# EAGLE board Li_Power_Boost_Converter-Panel-v12 (EAGLE 6.5.0), part 1 of 3
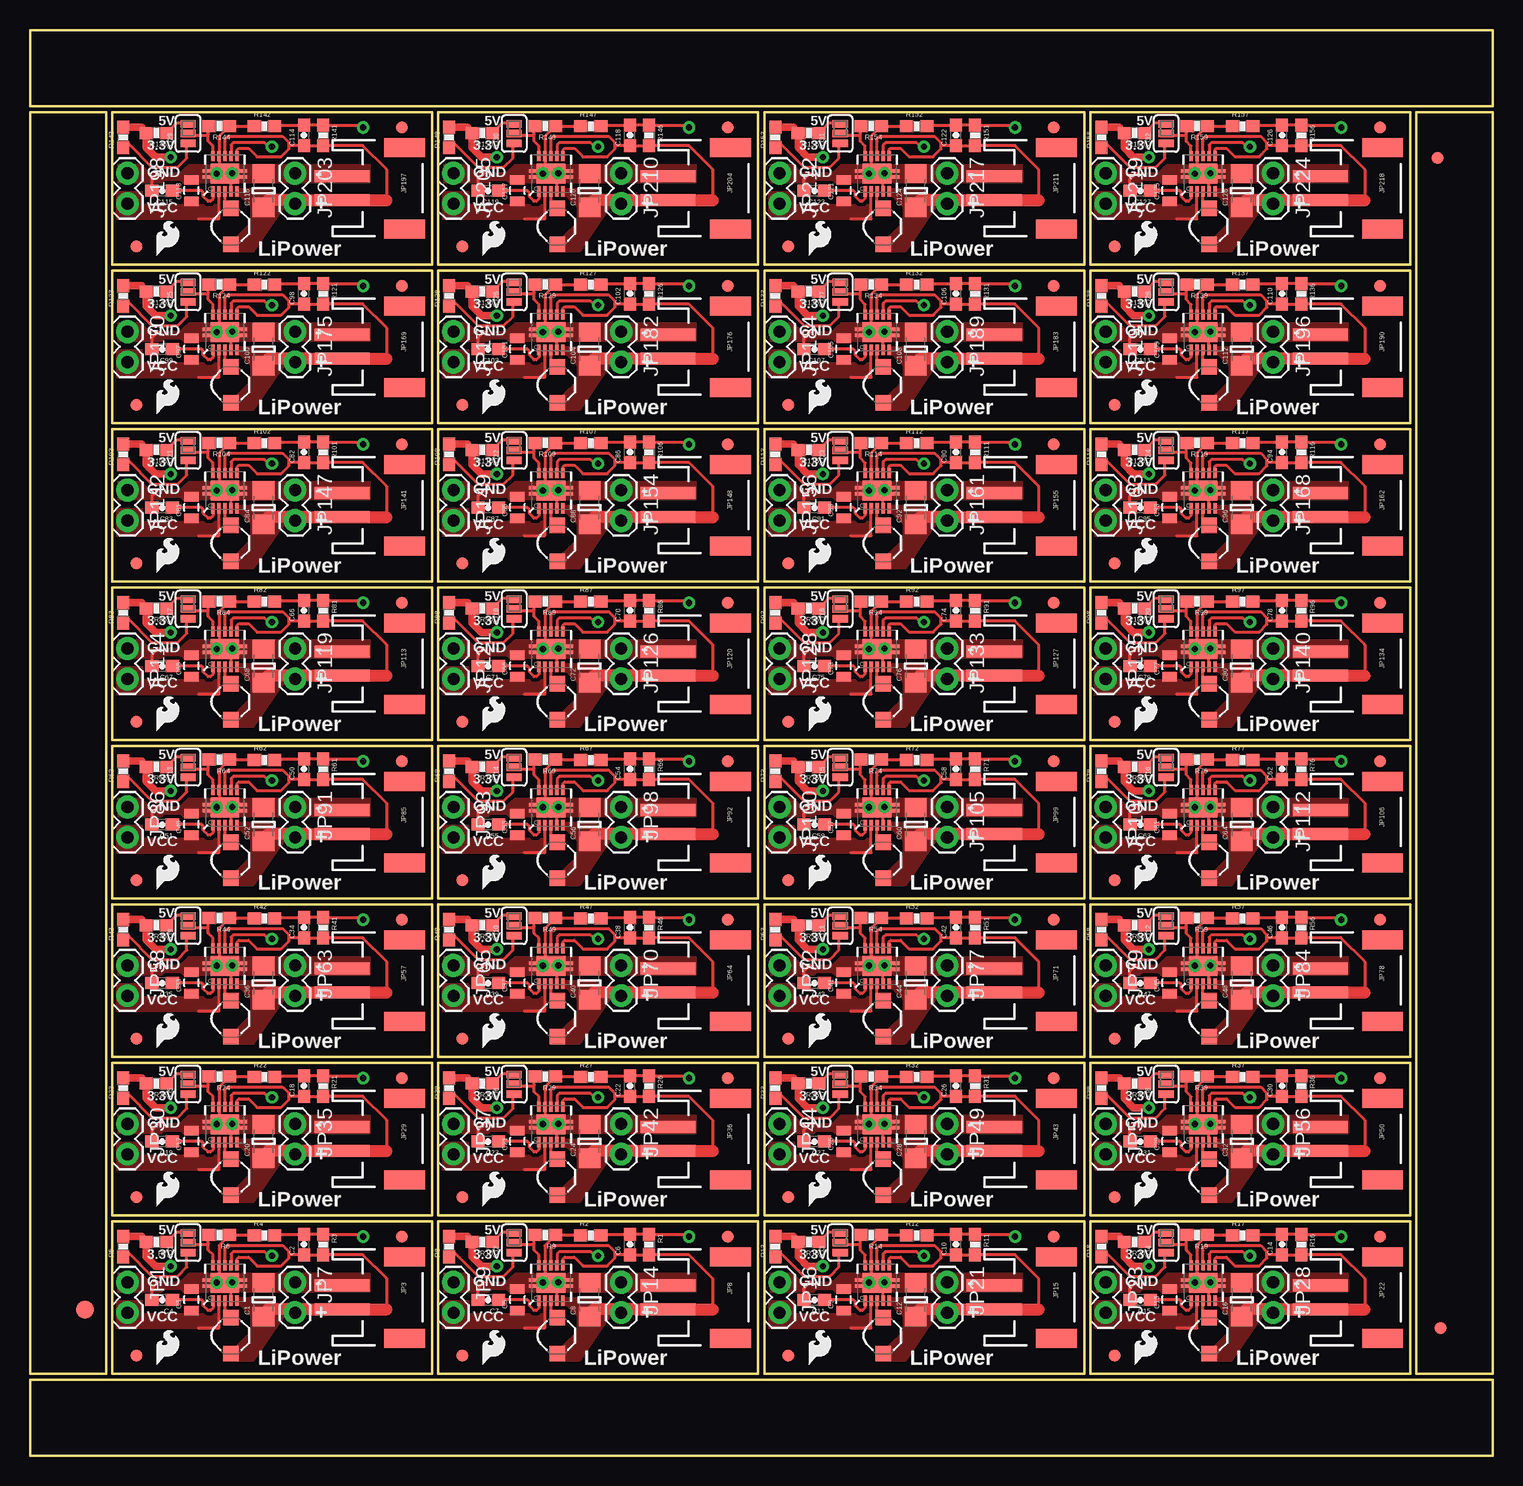
[diagram p0: board, top side]
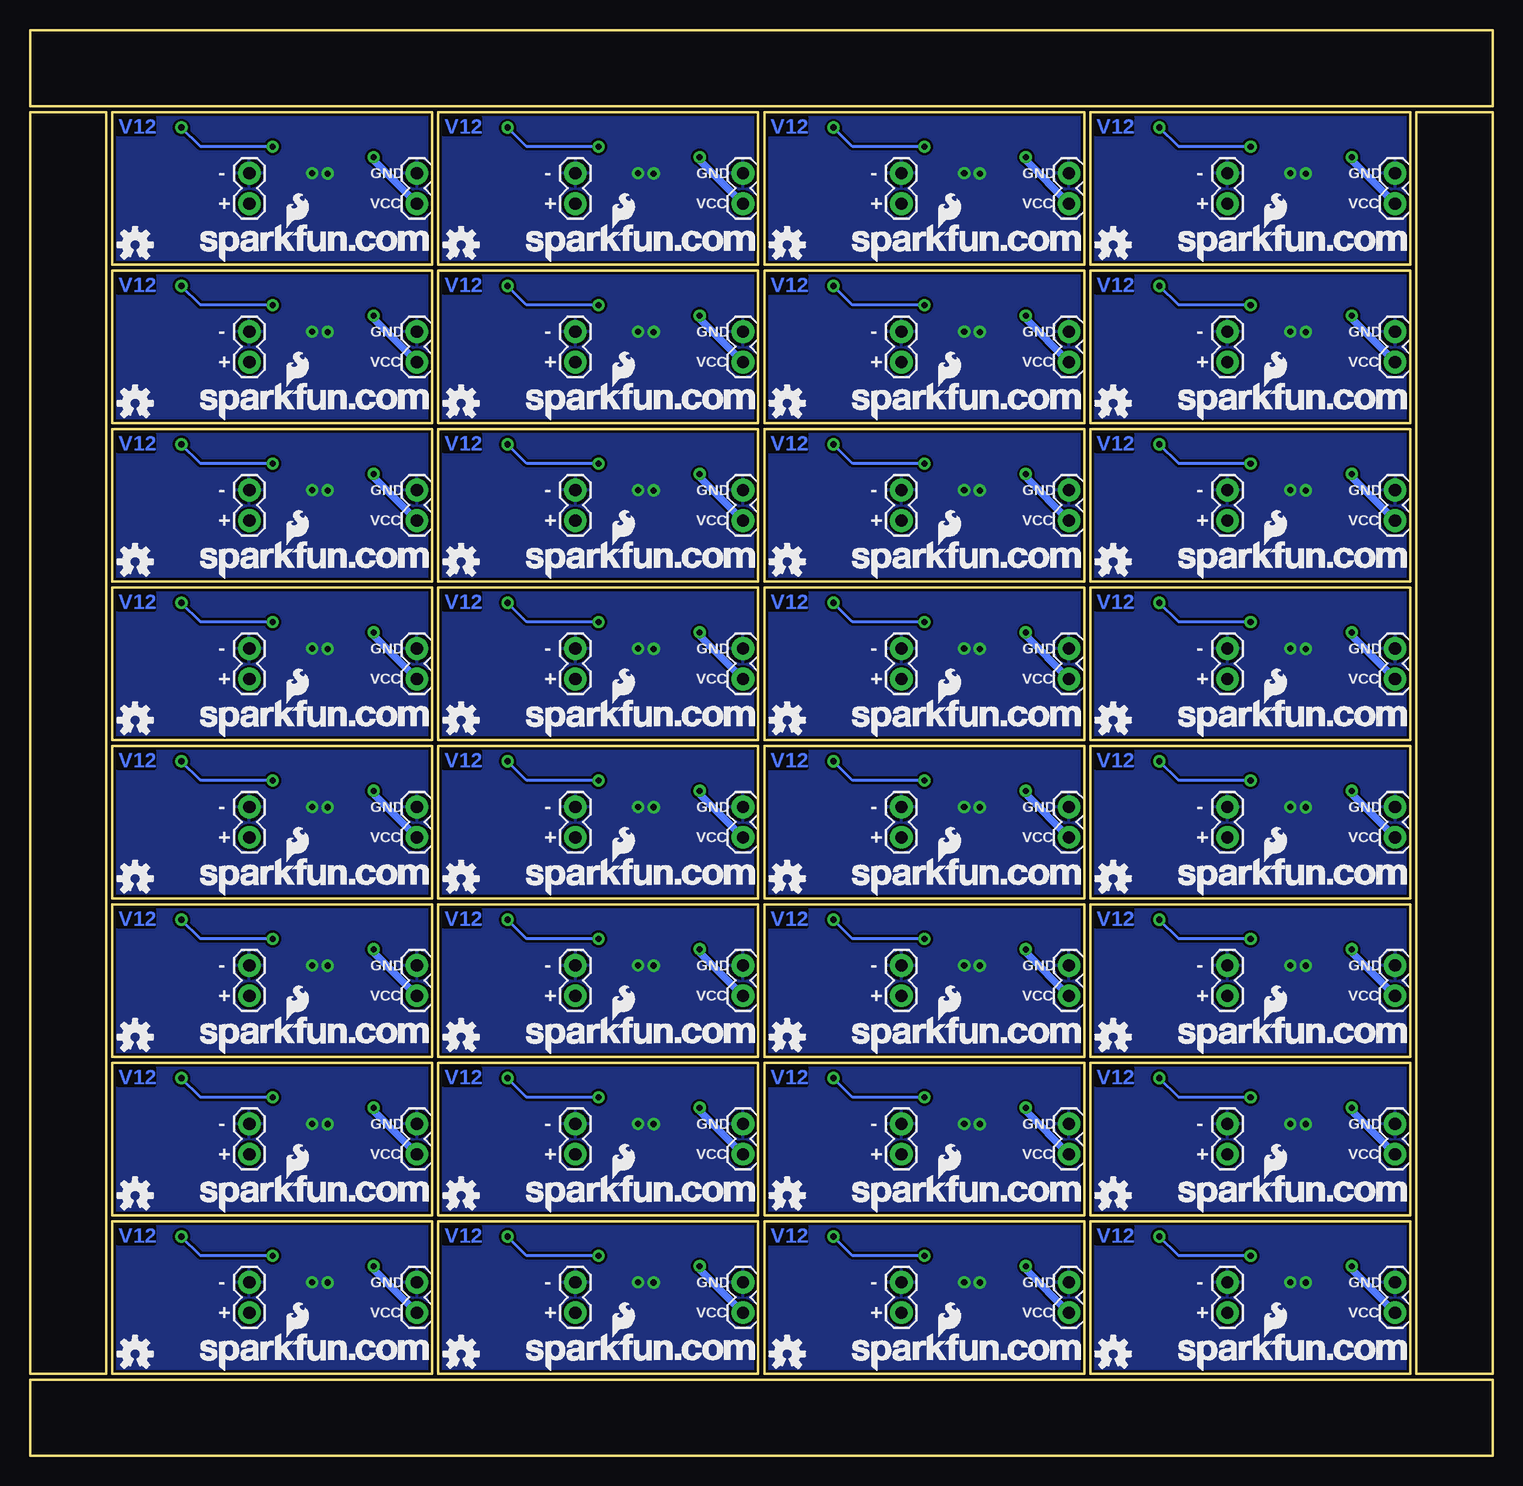
[diagram p1: board, bottom side, seen from below]

Size 121.92 x 118.87 mm. Coordinates in mm from the lower left corner, seen from the top.
Outline: 6.35,95.76 6.35,6.86 0,6.86 0,112.01 6.35,112.01 6.35,89.15
Outline: 29.72,6.35 0,6.35 0,0 121.92,0 121.92,6.35 26.16,6.35
Outline: 115.57,29.72 115.57,6.86 121.92,6.86 121.92,112.01 115.57,112.01 115.57,23.11
Outline: 92.2,112.52 121.92,112.52 121.92,118.87 0,118.87 0,112.52 95.76,112.52
Outline: 6.86,6.86 33.53,6.86 33.53,19.56 6.86,19.56 6.86,6.86
Outline: 34.04,6.86 60.71,6.86 60.71,19.56 34.04,19.56 34.04,6.86
Outline: 61.21,6.86 87.88,6.86 87.88,19.56 61.21,19.56 61.21,6.86
Outline: 88.39,6.86 115.06,6.86 115.06,19.56 88.39,19.56 88.39,6.86
Outline: 6.86,20.07 33.53,20.07 33.53,32.77 6.86,32.77 6.86,20.07
Outline: 34.04,20.07 60.71,20.07 60.71,32.77 34.04,32.77 34.04,20.07
Outline: 61.21,20.07 87.88,20.07 87.88,32.77 61.21,32.77 61.21,20.07
Outline: 88.39,20.07 115.06,20.07 115.06,32.77 88.39,32.77 88.39,20.07
Outline: 6.86,33.27 33.53,33.27 33.53,45.97 6.86,45.97 6.86,33.27
Outline: 34.04,33.27 60.71,33.27 60.71,45.97 34.04,45.97 34.04,33.27
Outline: 61.21,33.27 87.88,33.27 87.88,45.97 61.21,45.97 61.21,33.27
Outline: 88.39,33.27 115.06,33.27 115.06,45.97 88.39,45.97 88.39,33.27
Outline: 6.86,46.48 33.53,46.48 33.53,59.18 6.86,59.18 6.86,46.48
Outline: 34.04,46.48 60.71,46.48 60.71,59.18 34.04,59.18 34.04,46.48
Outline: 61.21,46.48 87.88,46.48 87.88,59.18 61.21,59.18 61.21,46.48
Outline: 88.39,46.48 115.06,46.48 115.06,59.18 88.39,59.18 88.39,46.48
Outline: 6.86,59.69 33.53,59.69 33.53,72.39 6.86,72.39 6.86,59.69
Outline: 34.04,59.69 60.71,59.69 60.71,72.39 34.04,72.39 34.04,59.69
Outline: 61.21,59.69 87.88,59.69 87.88,72.39 61.21,72.39 61.21,59.69
Outline: 88.39,59.69 115.06,59.69 115.06,72.39 88.39,72.39 88.39,59.69
Outline: 6.86,72.9 33.53,72.9 33.53,85.6 6.86,85.6 6.86,72.9
Outline: 34.04,72.9 60.71,72.9 60.71,85.6 34.04,85.6 34.04,72.9
Outline: 61.21,72.9 87.88,72.9 87.88,85.6 61.21,85.6 61.21,72.9
Outline: 88.39,72.9 115.06,72.9 115.06,85.6 88.39,85.6 88.39,72.9
Outline: 6.86,86.11 33.53,86.11 33.53,98.81 6.86,98.81 6.86,86.11
Outline: 34.04,86.11 60.71,86.11 60.71,98.81 34.04,98.81 34.04,86.11
Outline: 61.21,86.11 87.88,86.11 87.88,98.81 61.21,98.81 61.21,86.11
Outline: 88.39,86.11 115.06,86.11 115.06,98.81 88.39,98.81 88.39,86.11
Outline: 6.86,99.31 33.53,99.31 33.53,112.01 6.86,112.01 6.86,99.31
Outline: 34.04,99.31 60.71,99.31 60.71,112.01 34.04,112.01 34.04,99.31
Outline: 61.21,99.31 87.88,99.31 87.88,112.01 61.21,112.01 61.21,99.31
Outline: 88.39,99.31 115.06,99.31 115.06,112.01 88.39,112.01 88.39,99.31
Copper layers (1*16): Top 0.035mm / dielectric 1.5mm / Bottom 0.035mm
Design rules "SparkFun *": minimum track width 8mil, minimum drill 20mil, track to track 8mil, track to pad 8mil, pad to pad 8mil, via to via 8mil, smd to smd 8mil, copper to edge 8mil, drill to drill 8mil, minimum pad ring 12mil, minimum via ring 10mil, stop-mask expansion 4mil, vias tented up to drill 20mil, thermal gap 10mil

## Footprints (pad centres in the part's own frame; a part is rotated, then mirrored left to right if it is on the bottom)
1206 = smd 1.6 x 1.8: 1 -1.4,0; 2 1.4,0
0603-CAP = smd 1.1 x 1: 1 -0.85,0; 2 0.85,0
0805 = smd 0.8 x 1.2: 1 -0.9,0; 2 0.9,0
FIDUCIAL-1.5X3 = smd 1.5 x 1.5: 1 0,0
FIDUCIAL-1X2 = smd 1 x 1: 1 0,0
1X02 = drill 1.016 pad 1.88: 1 0,0; 2 2.54,0
JST-2-SMD = smd 1 x 4.6: 1 -1,-3.7; 2 1,-3.7 | smd 1.6 x 3.4: NC1 -3.4,1.5; NC2 3.4,1.5
CDRH2D09 = smd 1.3 x 1.3: P$1 -1.5,0; P$2 1.5,0
0603-RES = smd 1.1 x 1: 1 -0.85,0; 2 0.85,0
SJ_3_PASTE2&3 = smd 0.635 x 1.27: 1 -0.813,0; 2 0,0; 3 0.813,0
QFN-10_PAD = smd 0.297 x 0.85: 1 -1,-1.475; 2 -0.5,-1.475; 3 0,-1.475; 4 0.5,-1.475; 5 1,-1.475; 6 1,1.475; 7 0.5,1.475; 8 0,1.475; 9 -0.5,1.475; 10 -1,1.475 | smd 0.7 x 0.28: 11 -1.5,0.25; 12 -1.5,-0.25; 13 1.5,0.25; 14 1.5,-0.25 | smd 2.4 x 1.65: 15 0,0

## Placement (x,y rotation side)
C1  10uF  [1206]  19.48,13.03 90 top
C2  0.1uF  [0603-CAP]  22.83,17.63 90 top
C3  22uF  [0805]  13.46,13.03 90 top
C4  0.1uF  [0603-CAP]  11.02,13 180 top
C5  22uF  [0805]  40.64,13.03 90 top
C6  0.1uF  [0603-CAP]  50.01,17.63 90 top
C7  0.1uF  [0603-CAP]  38.2,13 180 top
C8  10uF  [1206]  46.66,13.03 90 top
C9  22uF  [0805]  67.82,13.03 90 top
C10  0.1uF  [0603-CAP]  77.19,17.63 90 top
C11  0.1uF  [0603-CAP]  65.38,13 180 top
C12  10uF  [1206]  73.84,13.03 90 top
C13  22uF  [0805]  95,13.03 90 top
C14  0.1uF  [0603-CAP]  104.37,17.63 90 top
C15  0.1uF  [0603-CAP]  92.56,13 180 top
C16  10uF  [1206]  101.02,13.03 90 top
C17  22uF  [0805]  13.46,26.24 90 top
C18  0.1uF  [0603-CAP]  22.83,30.84 90 top
C19  0.1uF  [0603-CAP]  11.02,26.21 180 top
C20  10uF  [1206]  19.48,26.24 90 top
C21  22uF  [0805]  40.64,26.24 90 top
C22  0.1uF  [0603-CAP]  50.01,30.84 90 top
C23  0.1uF  [0603-CAP]  38.2,26.21 180 top
C24  10uF  [1206]  46.66,26.24 90 top
C25  22uF  [0805]  67.82,26.24 90 top
C26  0.1uF  [0603-CAP]  77.19,30.84 90 top
C27  0.1uF  [0603-CAP]  65.38,26.21 180 top
C28  10uF  [1206]  73.84,26.24 90 top
C29  22uF  [0805]  95,26.24 90 top
C30  0.1uF  [0603-CAP]  104.37,30.84 90 top
C31  0.1uF  [0603-CAP]  92.56,26.21 180 top
C32  10uF  [1206]  101.02,26.24 90 top
C33  22uF  [0805]  13.46,39.45 90 top
C34  0.1uF  [0603-CAP]  22.83,44.04 90 top
C35  0.1uF  [0603-CAP]  11.02,39.42 180 top
C36  10uF  [1206]  19.48,39.45 90 top
C37  22uF  [0805]  40.64,39.45 90 top
C38  0.1uF  [0603-CAP]  50.01,44.04 90 top
C39  0.1uF  [0603-CAP]  38.2,39.42 180 top
C40  10uF  [1206]  46.66,39.45 90 top
C41  22uF  [0805]  67.82,39.45 90 top
C42  0.1uF  [0603-CAP]  77.19,44.04 90 top
C43  0.1uF  [0603-CAP]  65.38,39.42 180 top
C44  10uF  [1206]  73.84,39.45 90 top
C45  22uF  [0805]  95,39.45 90 top
C46  0.1uF  [0603-CAP]  104.37,44.04 90 top
C47  0.1uF  [0603-CAP]  92.56,39.42 180 top
C48  10uF  [1206]  101.02,39.45 90 top
C49  22uF  [0805]  13.46,52.65 90 top
C50  0.1uF  [0603-CAP]  22.83,57.25 90 top
C51  0.1uF  [0603-CAP]  11.02,52.63 180 top
C52  10uF  [1206]  19.48,52.65 90 top
C53  22uF  [0805]  40.64,52.65 90 top
C54  0.1uF  [0603-CAP]  50.01,57.25 90 top
C55  0.1uF  [0603-CAP]  38.2,52.63 180 top
C56  10uF  [1206]  46.66,52.65 90 top
C57  22uF  [0805]  67.82,52.65 90 top
C58  0.1uF  [0603-CAP]  77.19,57.25 90 top
C59  0.1uF  [0603-CAP]  65.38,52.63 180 top
C60  10uF  [1206]  73.84,52.65 90 top
C61  22uF  [0805]  95,52.65 90 top
C62  0.1uF  [0603-CAP]  104.37,57.25 90 top
C63  0.1uF  [0603-CAP]  92.56,52.63 180 top
C64  10uF  [1206]  101.02,52.65 90 top
C65  22uF  [0805]  13.46,65.86 90 top
C66  0.1uF  [0603-CAP]  22.83,70.46 90 top
C67  0.1uF  [0603-CAP]  11.02,65.84 180 top
C68  10uF  [1206]  19.48,65.86 90 top
C69  22uF  [0805]  40.64,65.86 90 top
C70  0.1uF  [0603-CAP]  50.01,70.46 90 top
C71  0.1uF  [0603-CAP]  38.2,65.84 180 top
C72  10uF  [1206]  46.66,65.86 90 top
C73  22uF  [0805]  67.82,65.86 90 top
C74  0.1uF  [0603-CAP]  77.19,70.46 90 top
C75  0.1uF  [0603-CAP]  65.38,65.84 180 top
C76  10uF  [1206]  73.84,65.86 90 top
C77  22uF  [0805]  95,65.86 90 top
C78  0.1uF  [0603-CAP]  104.37,70.46 90 top
C79  0.1uF  [0603-CAP]  92.56,65.84 180 top
C80  10uF  [1206]  101.02,65.86 90 top
C81  22uF  [0805]  13.46,79.07 90 top
C82  0.1uF  [0603-CAP]  22.83,83.67 90 top
C83  0.1uF  [0603-CAP]  11.02,79.04 180 top
C84  10uF  [1206]  19.48,79.07 90 top
C85  22uF  [0805]  40.64,79.07 90 top
C86  0.1uF  [0603-CAP]  50.01,83.67 90 top
C87  0.1uF  [0603-CAP]  38.2,79.04 180 top
C88  10uF  [1206]  46.66,79.07 90 top
C89  22uF  [0805]  67.82,79.07 90 top
C90  0.1uF  [0603-CAP]  77.19,83.67 90 top
C91  0.1uF  [0603-CAP]  65.38,79.04 180 top
C92  10uF  [1206]  73.84,79.07 90 top
C93  22uF  [0805]  95,79.07 90 top
C94  0.1uF  [0603-CAP]  104.37,83.67 90 top
C95  0.1uF  [0603-CAP]  92.56,79.04 180 top
C96  10uF  [1206]  101.02,79.07 90 top
C97  22uF  [0805]  13.46,92.28 90 top
C98  0.1uF  [0603-CAP]  22.83,96.88 90 top
C99  0.1uF  [0603-CAP]  11.02,92.25 180 top
C100  10uF  [1206]  19.48,92.28 90 top
C101  22uF  [0805]  40.64,92.28 90 top
C102  0.1uF  [0603-CAP]  50.01,96.88 90 top
C103  0.1uF  [0603-CAP]  38.2,92.25 180 top
C104  10uF  [1206]  46.66,92.28 90 top
C105  22uF  [0805]  67.82,92.28 90 top
C106  0.1uF  [0603-CAP]  77.19,96.88 90 top
C107  0.1uF  [0603-CAP]  65.38,92.25 180 top
C108  10uF  [1206]  73.84,92.28 90 top
C109  22uF  [0805]  95,92.28 90 top
C110  0.1uF  [0603-CAP]  104.37,96.88 90 top
C111  0.1uF  [0603-CAP]  92.56,92.25 180 top
C112  10uF  [1206]  101.02,92.28 90 top
C113  22uF  [0805]  13.46,105.49 90 top
C114  0.1uF  [0603-CAP]  22.83,110.08 90 top
C115  0.1uF  [0603-CAP]  11.02,105.46 180 top
C116  10uF  [1206]  19.48,105.49 90 top
C117  22uF  [0805]  40.64,105.49 90 top
C118  0.1uF  [0603-CAP]  50.01,110.08 90 top
C119  0.1uF  [0603-CAP]  38.2,105.46 180 top
C120  10uF  [1206]  46.66,105.49 90 top
C121  22uF  [0805]  67.82,105.49 90 top
C122  0.1uF  [0603-CAP]  77.19,110.08 90 top
C123  0.1uF  [0603-CAP]  65.38,105.46 180 top
C124  10uF  [1206]  73.84,105.49 90 top
C125  22uF  [0805]  95,105.49 90 top
C126  0.1uF  [0603-CAP]  104.37,110.08 90 top
C127  0.1uF  [0603-CAP]  92.56,105.46 180 top
C128  10uF  [1206]  101.02,105.49 90 top
E$1  [FIDUCIAL-1.5X3]  4.57,12.19 0 top
E$4  [FIDUCIAL-1X2]  117.6,10.67 0 top
E$5  [FIDUCIAL-1X2]  117.35,108.2 180 top
JP1  VOUT  [1X02]  8.13,14.48 270 top
JP2  LOGO-SFESK  [SFE-LOGO-FLAME]  10.57,7.65 0 top
JP3  JST  [JST-2-SMD]  29.72,13.21 270 top
JP4  FIDUCIAL1X2  [FIDUCIAL-1X2]  8.86,8.36 0 top
JP5  FIDUCIAL1X2  [FIDUCIAL-1X2]  30.99,18.29 0 top
JP6  LOGO-SFENEW  [SFE-NEW-WEBLOGO]  26.22,7.07 0 bottom
JP7  VIN  [1X02]  22.1,14.48 270 top
JP8  JST  [JST-2-SMD]  56.9,13.21 270 top
JP9  VOUT  [1X02]  35.31,14.48 270 top
JP10  LOGO-SFESK  [SFE-LOGO-FLAME]  37.74,7.65 0 top
JP11  FIDUCIAL1X2  [FIDUCIAL-1X2]  36.04,8.36 0 top
JP12  FIDUCIAL1X2  [FIDUCIAL-1X2]  58.17,18.29 0 top
JP13  LOGO-SFENEW  [SFE-NEW-WEBLOGO]  53.4,7.07 0 bottom
JP14  VIN  [1X02]  49.28,14.48 270 top
JP15  JST  [JST-2-SMD]  84.07,13.21 270 top
JP16  VOUT  [1X02]  62.48,14.48 270 top
JP17  LOGO-SFESK  [SFE-LOGO-FLAME]  64.92,7.65 0 top
JP18  FIDUCIAL1X2  [FIDUCIAL-1X2]  63.22,8.36 0 top
JP19  FIDUCIAL1X2  [FIDUCIAL-1X2]  85.34,18.29 0 top
JP20  LOGO-SFENEW  [SFE-NEW-WEBLOGO]  80.57,7.07 0 bottom
JP21  VIN  [1X02]  76.45,14.48 270 top
JP22  JST  [JST-2-SMD]  111.25,13.21 270 top
JP23  VOUT  [1X02]  89.66,14.48 270 top
JP24  LOGO-SFESK  [SFE-LOGO-FLAME]  92.1,7.65 0 top
JP25  FIDUCIAL1X2  [FIDUCIAL-1X2]  90.4,8.36 0 top
JP26  FIDUCIAL1X2  [FIDUCIAL-1X2]  112.52,18.29 0 top
JP27  LOGO-SFENEW  [SFE-NEW-WEBLOGO]  107.75,7.07 0 bottom
JP28  VIN  [1X02]  103.63,14.48 270 top
JP29  JST  [JST-2-SMD]  29.72,26.42 270 top
JP30  VOUT  [1X02]  8.13,27.69 270 top
JP31  LOGO-SFESK  [SFE-LOGO-FLAME]  10.57,20.85 0 top
JP32  FIDUCIAL1X2  [FIDUCIAL-1X2]  8.86,21.56 0 top
JP33  FIDUCIAL1X2  [FIDUCIAL-1X2]  30.99,31.5 0 top
JP34  LOGO-SFENEW  [SFE-NEW-WEBLOGO]  26.22,20.28 0 bottom
JP35  VIN  [1X02]  22.1,27.69 270 top
JP36  JST  [JST-2-SMD]  56.9,26.42 270 top
JP37  VOUT  [1X02]  35.31,27.69 270 top
JP38  LOGO-SFESK  [SFE-LOGO-FLAME]  37.74,20.85 0 top
JP39  FIDUCIAL1X2  [FIDUCIAL-1X2]  36.04,21.56 0 top
JP40  FIDUCIAL1X2  [FIDUCIAL-1X2]  58.17,31.5 0 top
JP41  LOGO-SFENEW  [SFE-NEW-WEBLOGO]  53.4,20.28 0 bottom
JP42  VIN  [1X02]  49.28,27.69 270 top
JP43  JST  [JST-2-SMD]  84.07,26.42 270 top
JP44  VOUT  [1X02]  62.48,27.69 270 top
JP45  LOGO-SFESK  [SFE-LOGO-FLAME]  64.92,20.85 0 top
JP46  FIDUCIAL1X2  [FIDUCIAL-1X2]  63.22,21.56 0 top
JP47  FIDUCIAL1X2  [FIDUCIAL-1X2]  85.34,31.5 0 top
JP48  LOGO-SFENEW  [SFE-NEW-WEBLOGO]  80.57,20.28 0 bottom
JP49  VIN  [1X02]  76.45,27.69 270 top
JP50  JST  [JST-2-SMD]  111.25,26.42 270 top
JP51  VOUT  [1X02]  89.66,27.69 270 top
JP52  LOGO-SFESK  [SFE-LOGO-FLAME]  92.1,20.85 0 top
JP53  FIDUCIAL1X2  [FIDUCIAL-1X2]  90.4,21.56 0 top
JP54  FIDUCIAL1X2  [FIDUCIAL-1X2]  112.52,31.5 0 top
JP55  LOGO-SFENEW  [SFE-NEW-WEBLOGO]  107.75,20.28 0 bottom
JP56  VIN  [1X02]  103.63,27.69 270 top
JP57  JST  [JST-2-SMD]  29.72,39.62 270 top
JP58  VOUT  [1X02]  8.13,40.89 270 top
JP59  LOGO-SFESK  [SFE-LOGO-FLAME]  10.57,34.06 0 top
JP60  FIDUCIAL1X2  [FIDUCIAL-1X2]  8.86,34.77 0 top
JP61  FIDUCIAL1X2  [FIDUCIAL-1X2]  30.99,44.7 0 top
JP62  LOGO-SFENEW  [SFE-NEW-WEBLOGO]  26.22,33.48 0 bottom
JP63  VIN  [1X02]  22.1,40.89 270 top
JP64  JST  [JST-2-SMD]  56.9,39.62 270 top
JP65  VOUT  [1X02]  35.31,40.89 270 top
JP66  LOGO-SFESK  [SFE-LOGO-FLAME]  37.74,34.06 0 top
JP67  FIDUCIAL1X2  [FIDUCIAL-1X2]  36.04,34.77 0 top
JP68  FIDUCIAL1X2  [FIDUCIAL-1X2]  58.17,44.7 0 top
JP69  LOGO-SFENEW  [SFE-NEW-WEBLOGO]  53.4,33.48 0 bottom
JP70  VIN  [1X02]  49.28,40.89 270 top
JP71  JST  [JST-2-SMD]  84.07,39.62 270 top
JP72  VOUT  [1X02]  62.48,40.89 270 top
JP73  LOGO-SFESK  [SFE-LOGO-FLAME]  64.92,34.06 0 top
JP74  FIDUCIAL1X2  [FIDUCIAL-1X2]  63.22,34.77 0 top
JP75  FIDUCIAL1X2  [FIDUCIAL-1X2]  85.34,44.7 0 top
JP76  LOGO-SFENEW  [SFE-NEW-WEBLOGO]  80.57,33.48 0 bottom
JP77  VIN  [1X02]  76.45,40.89 270 top
JP78  JST  [JST-2-SMD]  111.25,39.62 270 top
JP79  VOUT  [1X02]  89.66,40.89 270 top
JP80  LOGO-SFESK  [SFE-LOGO-FLAME]  92.1,34.06 0 top
JP81  FIDUCIAL1X2  [FIDUCIAL-1X2]  90.4,34.77 0 top
JP82  FIDUCIAL1X2  [FIDUCIAL-1X2]  112.52,44.7 0 top
JP83  LOGO-SFENEW  [SFE-NEW-WEBLOGO]  107.75,33.48 0 bottom
JP84  VIN  [1X02]  103.63,40.89 270 top
JP85  JST  [JST-2-SMD]  29.72,52.83 270 top
JP86  VOUT  [1X02]  8.13,54.1 270 top
JP87  LOGO-SFESK  [SFE-LOGO-FLAME]  10.57,47.27 0 top
JP88  FIDUCIAL1X2  [FIDUCIAL-1X2]  8.86,47.98 0 top
JP89  FIDUCIAL1X2  [FIDUCIAL-1X2]  30.99,57.91 0 top
JP90  LOGO-SFENEW  [SFE-NEW-WEBLOGO]  26.22,46.69 0 bottom
JP91  VIN  [1X02]  22.1,54.1 270 top
JP92  JST  [JST-2-SMD]  56.9,52.83 270 top
JP93  VOUT  [1X02]  35.31,54.1 270 top
JP94  LOGO-SFESK  [SFE-LOGO-FLAME]  37.74,47.27 0 top
JP95  FIDUCIAL1X2  [FIDUCIAL-1X2]  36.04,47.98 0 top
JP96  FIDUCIAL1X2  [FIDUCIAL-1X2]  58.17,57.91 0 top
JP97  LOGO-SFENEW  [SFE-NEW-WEBLOGO]  53.4,46.69 0 bottom
JP98  VIN  [1X02]  49.28,54.1 270 top
JP99  JST  [JST-2-SMD]  84.07,52.83 270 top
JP100  VOUT  [1X02]  62.48,54.1 270 top
JP101  LOGO-SFESK  [SFE-LOGO-FLAME]  64.92,47.27 0 top
JP102  FIDUCIAL1X2  [FIDUCIAL-1X2]  63.22,47.98 0 top
JP103  FIDUCIAL1X2  [FIDUCIAL-1X2]  85.34,57.91 0 top
JP104  LOGO-SFENEW  [SFE-NEW-WEBLOGO]  80.57,46.69 0 bottom
JP105  VIN  [1X02]  76.45,54.1 270 top
JP106  JST  [JST-2-SMD]  111.25,52.83 270 top
JP107  VOUT  [1X02]  89.66,54.1 270 top
JP108  LOGO-SFESK  [SFE-LOGO-FLAME]  92.1,47.27 0 top
JP109  FIDUCIAL1X2  [FIDUCIAL-1X2]  90.4,47.98 0 top
JP110  FIDUCIAL1X2  [FIDUCIAL-1X2]  112.52,57.91 0 top
JP111  LOGO-SFENEW  [SFE-NEW-WEBLOGO]  107.75,46.69 0 bottom
JP112  VIN  [1X02]  103.63,54.1 270 top
JP113  JST  [JST-2-SMD]  29.72,66.04 270 top
JP114  VOUT  [1X02]  8.13,67.31 270 top
JP115  LOGO-SFESK  [SFE-LOGO-FLAME]  10.57,60.48 0 top
JP116  FIDUCIAL1X2  [FIDUCIAL-1X2]  8.86,61.19 0 top
JP117  FIDUCIAL1X2  [FIDUCIAL-1X2]  30.99,71.12 0 top
JP118  LOGO-SFENEW  [SFE-NEW-WEBLOGO]  26.22,59.9 0 bottom
JP119  VIN  [1X02]  22.1,67.31 270 top
JP120  JST  [JST-2-SMD]  56.9,66.04 270 top
JP121  VOUT  [1X02]  35.31,67.31 270 top
JP122  LOGO-SFESK  [SFE-LOGO-FLAME]  37.74,60.48 0 top
JP123  FIDUCIAL1X2  [FIDUCIAL-1X2]  36.04,61.19 0 top
JP124  FIDUCIAL1X2  [FIDUCIAL-1X2]  58.17,71.12 0 top
JP125  LOGO-SFENEW  [SFE-NEW-WEBLOGO]  53.4,59.9 0 bottom
JP126  VIN  [1X02]  49.28,67.31 270 top
JP127  JST  [JST-2-SMD]  84.07,66.04 270 top
JP128  VOUT  [1X02]  62.48,67.31 270 top
JP129  LOGO-SFESK  [SFE-LOGO-FLAME]  64.92,60.48 0 top
JP130  FIDUCIAL1X2  [FIDUCIAL-1X2]  63.22,61.19 0 top
JP131  FIDUCIAL1X2  [FIDUCIAL-1X2]  85.34,71.12 0 top
JP132  LOGO-SFENEW  [SFE-NEW-WEBLOGO]  80.57,59.9 0 bottom
JP133  VIN  [1X02]  76.45,67.31 270 top
JP134  JST  [JST-2-SMD]  111.25,66.04 270 top
JP135  VOUT  [1X02]  89.66,67.31 270 top
JP136  LOGO-SFESK  [SFE-LOGO-FLAME]  92.1,60.48 0 top
JP137  FIDUCIAL1X2  [FIDUCIAL-1X2]  90.4,61.19 0 top
JP138  FIDUCIAL1X2  [FIDUCIAL-1X2]  112.52,71.12 0 top
JP139  LOGO-SFENEW  [SFE-NEW-WEBLOGO]  107.75,59.9 0 bottom
JP140  VIN  [1X02]  103.63,67.31 270 top
JP141  JST  [JST-2-SMD]  29.72,79.25 270 top
JP142  VOUT  [1X02]  8.13,80.52 270 top
JP143  LOGO-SFESK  [SFE-LOGO-FLAME]  10.57,73.69 0 top
JP144  FIDUCIAL1X2  [FIDUCIAL-1X2]  8.86,74.4 0 top
JP145  FIDUCIAL1X2  [FIDUCIAL-1X2]  30.99,84.33 0 top
JP146  LOGO-SFENEW  [SFE-NEW-WEBLOGO]  26.22,73.11 0 bottom
JP147  VIN  [1X02]  22.1,80.52 270 top
JP148  JST  [JST-2-SMD]  56.9,79.25 270 top
JP149  VOUT  [1X02]  35.31,80.52 270 top
JP150  LOGO-SFESK  [SFE-LOGO-FLAME]  37.74,73.69 0 top
JP151  FIDUCIAL1X2  [FIDUCIAL-1X2]  36.04,74.4 0 top
JP152  FIDUCIAL1X2  [FIDUCIAL-1X2]  58.17,84.33 0 top
JP153  LOGO-SFENEW  [SFE-NEW-WEBLOGO]  53.4,73.11 0 bottom
JP154  VIN  [1X02]  49.28,80.52 270 top
JP155  JST  [JST-2-SMD]  84.07,79.25 270 top
JP156  VOUT  [1X02]  62.48,80.52 270 top
JP157  LOGO-SFESK  [SFE-LOGO-FLAME]  64.92,73.69 0 top
JP158  FIDUCIAL1X2  [FIDUCIAL-1X2]  63.22,74.4 0 top
JP159  FIDUCIAL1X2  [FIDUCIAL-1X2]  85.34,84.33 0 top
JP160  LOGO-SFENEW  [SFE-NEW-WEBLOGO]  80.57,73.11 0 bottom
JP161  VIN  [1X02]  76.45,80.52 270 top
JP162  JST  [JST-2-SMD]  111.25,79.25 270 top
JP163  VOUT  [1X02]  89.66,80.52 270 top
JP164  LOGO-SFESK  [SFE-LOGO-FLAME]  92.1,73.69 0 top
JP165  FIDUCIAL1X2  [FIDUCIAL-1X2]  90.4,74.4 0 top
JP166  FIDUCIAL1X2  [FIDUCIAL-1X2]  112.52,84.33 0 top
JP167  LOGO-SFENEW  [SFE-NEW-WEBLOGO]  107.75,73.11 0 bottom
JP168  VIN  [1X02]  103.63,80.52 270 top
JP169  JST  [JST-2-SMD]  29.72,92.46 270 top
JP170  VOUT  [1X02]  8.13,93.73 270 top
JP171  LOGO-SFESK  [SFE-LOGO-FLAME]  10.57,86.89 0 top
JP172  FIDUCIAL1X2  [FIDUCIAL-1X2]  8.86,87.6 0 top
JP173  FIDUCIAL1X2  [FIDUCIAL-1X2]  30.99,97.54 0 top
JP174  LOGO-SFENEW  [SFE-NEW-WEBLOGO]  26.22,86.32 0 bottom
JP175  VIN  [1X02]  22.1,93.73 270 top
JP176  JST  [JST-2-SMD]  56.9,92.46 270 top
JP177  VOUT  [1X02]  35.31,93.73 270 top
JP178  LOGO-SFESK  [SFE-LOGO-FLAME]  37.74,86.89 0 top
JP179  FIDUCIAL1X2  [FIDUCIAL-1X2]  36.04,87.6 0 top
JP180  FIDUCIAL1X2  [FIDUCIAL-1X2]  58.17,97.54 0 top
JP181  LOGO-SFENEW  [SFE-NEW-WEBLOGO]  53.4,86.32 0 bottom
JP182  VIN  [1X02]  49.28,93.73 270 top
JP183  JST  [JST-2-SMD]  84.07,92.46 270 top
JP184  VOUT  [1X02]  62.48,93.73 270 top
JP185  LOGO-SFESK  [SFE-LOGO-FLAME]  64.92,86.89 0 top
JP186  FIDUCIAL1X2  [FIDUCIAL-1X2]  63.22,87.6 0 top
JP187  FIDUCIAL1X2  [FIDUCIAL-1X2]  85.34,97.54 0 top
JP188  LOGO-SFENEW  [SFE-NEW-WEBLOGO]  80.57,86.32 0 bottom
JP189  VIN  [1X02]  76.45,93.73 270 top
JP190  JST  [JST-2-SMD]  111.25,92.46 270 top
JP191  VOUT  [1X02]  89.66,93.73 270 top
JP192  LOGO-SFESK  [SFE-LOGO-FLAME]  92.1,86.89 0 top
JP193  FIDUCIAL1X2  [FIDUCIAL-1X2]  90.4,87.6 0 top
JP194  FIDUCIAL1X2  [FIDUCIAL-1X2]  112.52,97.54 0 top
JP195  LOGO-SFENEW  [SFE-NEW-WEBLOGO]  107.75,86.32 0 bottom
JP196  VIN  [1X02]  103.63,93.73 270 top
JP197  JST  [JST-2-SMD]  29.72,105.66 270 top
JP198  VOUT  [1X02]  8.13,106.93 270 top
JP199  LOGO-SFESK  [SFE-LOGO-FLAME]  10.57,100.1 0 top
JP200  FIDUCIAL1X2  [FIDUCIAL-1X2]  8.86,100.81 0 top
JP201  FIDUCIAL1X2  [FIDUCIAL-1X2]  30.99,110.74 0 top
JP202  LOGO-SFENEW  [SFE-NEW-WEBLOGO]  26.22,99.52 0 bottom
JP203  VIN  [1X02]  22.1,106.93 270 top
JP204  JST  [JST-2-SMD]  56.9,105.66 270 top
JP205  VOUT  [1X02]  35.31,106.93 270 top
JP206  LOGO-SFESK  [SFE-LOGO-FLAME]  37.74,100.1 0 top
JP207  FIDUCIAL1X2  [FIDUCIAL-1X2]  36.04,100.81 0 top
JP208  FIDUCIAL1X2  [FIDUCIAL-1X2]  58.17,110.74 0 top
JP209  LOGO-SFENEW  [SFE-NEW-WEBLOGO]  53.4,99.52 0 bottom
JP210  VIN  [1X02]  49.28,106.93 270 top
JP211  JST  [JST-2-SMD]  84.07,105.66 270 top
JP212  VOUT  [1X02]  62.48,106.93 270 top
JP213  LOGO-SFESK  [SFE-LOGO-FLAME]  64.92,100.1 0 top
JP214  FIDUCIAL1X2  [FIDUCIAL-1X2]  63.22,100.81 0 top
JP215  FIDUCIAL1X2  [FIDUCIAL-1X2]  85.34,110.74 0 top
JP216  LOGO-SFENEW  [SFE-NEW-WEBLOGO]  80.57,99.52 0 bottom
JP217  VIN  [1X02]  76.45,106.93 270 top
JP218  JST  [JST-2-SMD]  111.25,105.66 270 top
JP219  VOUT  [1X02]  89.66,106.93 270 top
JP220  LOGO-SFESK  [SFE-LOGO-FLAME]  92.1,100.1 0 top
JP221  FIDUCIAL1X2  [FIDUCIAL-1X2]  90.4,100.81 0 top
JP222  FIDUCIAL1X2  [FIDUCIAL-1X2]  112.52,110.74 0 top
JP223  LOGO-SFENEW  [SFE-NEW-WEBLOGO]  107.75,99.52 0 bottom
JP224  VIN  [1X02]  103.63,106.93 270 top
L1  4.7uH, 1.2A  [CDRH2D09]  16.76,10.03 270 top
L2  4.7uH, 1.2A  [CDRH2D09]  43.94,10.03 270 top
L3  4.7uH, 1.2A  [CDRH2D09]  71.12,10.03 270 top
L4  4.7uH, 1.2A  [CDRH2D09]  98.3,10.03 270 top
L5  4.7uH, 1.2A  [CDRH2D09]  16.76,23.24 270 top
L6  4.7uH, 1.2A  [CDRH2D09]  43.94,23.24 270 top
L7  4.7uH, 1.2A  [CDRH2D09]  71.12,23.24 270 top
L8  4.7uH, 1.2A  [CDRH2D09]  98.3,23.24 270 top
L9  4.7uH, 1.2A  [CDRH2D09]  16.76,36.45 270 top
L10  4.7uH, 1.2A  [CDRH2D09]  43.94,36.45 270 top
L11  4.7uH, 1.2A  [CDRH2D09]  71.12,36.45 270 top
L12  4.7uH, 1.2A  [CDRH2D09]  98.3,36.45 270 top
L13  4.7uH, 1.2A  [CDRH2D09]  16.76,49.66 270 top
L14  4.7uH, 1.2A  [CDRH2D09]  43.94,49.66 270 top
L15  4.7uH, 1.2A  [CDRH2D09]  71.12,49.66 270 top
L16  4.7uH, 1.2A  [CDRH2D09]  98.3,49.66 270 top
L17  4.7uH, 1.2A  [CDRH2D09]  16.76,62.86 270 top
L18  4.7uH, 1.2A  [CDRH2D09]  43.94,62.86 270 top
L19  4.7uH, 1.2A  [CDRH2D09]  71.12,62.86 270 top
L20  4.7uH, 1.2A  [CDRH2D09]  98.3,62.86 270 top
L21  4.7uH, 1.2A  [CDRH2D09]  16.76,76.07 270 top
L22  4.7uH, 1.2A  [CDRH2D09]  43.94,76.07 270 top
L23  4.7uH, 1.2A  [CDRH2D09]  71.12,76.07 270 top
L24  4.7uH, 1.2A  [CDRH2D09]  98.3,76.07 270 top
L25  4.7uH, 1.2A  [CDRH2D09]  16.76,89.28 270 top
L26  4.7uH, 1.2A  [CDRH2D09]  43.94,89.28 270 top
L27  4.7uH, 1.2A  [CDRH2D09]  71.12,89.28 270 top
L28  4.7uH, 1.2A  [CDRH2D09]  98.3,89.28 270 top
L29  4.7uH, 1.2A  [CDRH2D09]  16.76,102.49 270 top
L30  4.7uH, 1.2A  [CDRH2D09]  43.94,102.49 270 top
L31  4.7uH, 1.2A  [CDRH2D09]  71.12,102.49 270 top
L32  4.7uH, 1.2A  [CDRH2D09]  98.3,102.49 270 top
R1  2M  [0603-RES]  51.61,17.63 270 top
R2  220k  [0603-RES]  46.74,18.39 0 top
R3  2M  [0603-RES]  24.43,17.63 270 top
R4  220k  [0603-RES]  19.56,18.39 0 top
R5  1.2M  [0603-RES]  7.77,17.45 90 top
R6  220k  [0603-RES]  15.77,18.41 180 top
R7  2M  [0603-RES]  10.54,17.83 180 top
R8  1.2M  [0603-RES]  34.95,17.45 90 top
R9  220k  [0603-RES]  42.95,18.41 180 top
R10  2M  [0603-RES]  37.72,17.83 180 top
R11  2M  [0603-RES]  78.79,17.63 270 top
R12  220k  [0603-RES]  73.91,18.39 0 top
R13  1.2M  [0603-RES]  62.13,17.45 90 top
R14  220k  [0603-RES]  70.13,18.41 180 top
R15  2M  [0603-RES]  64.9,17.83 180 top
R16  2M  [0603-RES]  105.97,17.63 270 top
R17  220k  [0603-RES]  101.09,18.39 0 top
R18  1.2M  [0603-RES]  89.31,17.45 90 top
R19  220k  [0603-RES]  97.31,18.41 180 top
R20  2M  [0603-RES]  92.08,17.83 180 top
R21  2M  [0603-RES]  24.43,30.84 270 top
R22  220k  [0603-RES]  19.56,31.6 0 top
R23  1.2M  [0603-RES]  7.77,30.66 90 top
R24  220k  [0603-RES]  15.77,31.62 180 top
R25  2M  [0603-RES]  10.54,31.04 180 top
R26  2M  [0603-RES]  51.61,30.84 270 top
R27  220k  [0603-RES]  46.74,31.6 0 top
R28  1.2M  [0603-RES]  34.95,30.66 90 top
R29  220k  [0603-RES]  42.95,31.62 180 top
R30  2M  [0603-RES]  37.72,31.04 180 top
R31  2M  [0603-RES]  78.79,30.84 270 top
R32  220k  [0603-RES]  73.91,31.6 0 top
R33  1.2M  [0603-RES]  62.13,30.66 90 top
R34  220k  [0603-RES]  70.13,31.62 180 top
R35  2M  [0603-RES]  64.9,31.04 180 top
R36  2M  [0603-RES]  105.97,30.84 270 top
R37  220k  [0603-RES]  101.09,31.6 0 top
R38  1.2M  [0603-RES]  89.31,30.66 90 top
R39  220k  [0603-RES]  97.31,31.62 180 top
R40  2M  [0603-RES]  92.08,31.04 180 top
R41  2M  [0603-RES]  24.43,44.04 270 top
R42  220k  [0603-RES]  19.56,44.81 0 top
R43  1.2M  [0603-RES]  7.77,43.87 90 top
R44  220k  [0603-RES]  15.77,44.83 180 top
R45  2M  [0603-RES]  10.54,44.25 180 top
R46  2M  [0603-RES]  51.61,44.04 270 top
R47  220k  [0603-RES]  46.74,44.81 0 top
R48  1.2M  [0603-RES]  34.95,43.87 90 top
R49  220k  [0603-RES]  42.95,44.83 180 top
R50  2M  [0603-RES]  37.72,44.25 180 top
R51  2M  [0603-RES]  78.79,44.04 270 top
R52  220k  [0603-RES]  73.91,44.81 0 top
R53  1.2M  [0603-RES]  62.13,43.87 90 top
R54  220k  [0603-RES]  70.13,44.83 180 top
R55  2M  [0603-RES]  64.9,44.25 180 top
R56  2M  [0603-RES]  105.97,44.04 270 top
R57  220k  [0603-RES]  101.09,44.81 0 top
R58  1.2M  [0603-RES]  89.31,43.87 90 top
R59  220k  [0603-RES]  97.31,44.83 180 top
R60  2M  [0603-RES]  92.08,44.25 180 top
R61  2M  [0603-RES]  24.43,57.25 270 top
R62  220k  [0603-RES]  19.56,58.01 0 top
R63  1.2M  [0603-RES]  7.77,57.07 90 top
R64  220k  [0603-RES]  15.77,58.04 180 top
R65  2M  [0603-RES]  10.54,57.45 180 top
R66  2M  [0603-RES]  51.61,57.25 270 top
R67  220k  [0603-RES]  46.74,58.01 0 top
R68  1.2M  [0603-RES]  34.95,57.07 90 top
R69  220k  [0603-RES]  42.95,58.04 180 top
R70  2M  [0603-RES]  37.72,57.45 180 top
R71  2M  [0603-RES]  78.79,57.25 270 top
R72  220k  [0603-RES]  73.91,58.01 0 top
R73  1.2M  [0603-RES]  62.13,57.07 90 top
R74  220k  [0603-RES]  70.13,58.04 180 top
R75  2M  [0603-RES]  64.9,57.45 180 top
R76  2M  [0603-RES]  105.97,57.25 270 top
R77  220k  [0603-RES]  101.09,58.01 0 top
R78  1.2M  [0603-RES]  89.31,57.07 90 top
R79  220k  [0603-RES]  97.31,58.04 180 top
R80  2M  [0603-RES]  92.08,57.45 180 top
R81  2M  [0603-RES]  24.43,70.46 270 top
R82  220k  [0603-RES]  19.56,71.22 0 top
R83  1.2M  [0603-RES]  7.77,70.28 90 top
R84  220k  [0603-RES]  15.77,71.25 180 top
R85  2M  [0603-RES]  10.54,70.66 180 top
R86  2M  [0603-RES]  51.61,70.46 270 top
R87  220k  [0603-RES]  46.74,71.22 0 top
R88  1.2M  [0603-RES]  34.95,70.28 90 top
R89  220k  [0603-RES]  42.95,71.25 180 top
R90  2M  [0603-RES]  37.72,70.66 180 top
R91  2M  [0603-RES]  78.79,70.46 270 top
R92  220k  [0603-RES]  73.91,71.22 0 top
R93  1.2M  [0603-RES]  62.13,70.28 90 top
R94  220k  [0603-RES]  70.13,71.25 180 top
R95  2M  [0603-RES]  64.9,70.66 180 top
R96  2M  [0603-RES]  105.97,70.46 270 top
R97  220k  [0603-RES]  101.09,71.22 0 top
R98  1.2M  [0603-RES]  89.31,70.28 90 top
R99  220k  [0603-RES]  97.31,71.25 180 top
R100  2M  [0603-RES]  92.08,70.66 180 top
R101  2M  [0603-RES]  24.43,83.67 270 top
R102  220k  [0603-RES]  19.56,84.43 0 top
R103  1.2M  [0603-RES]  7.77,83.49 90 top
R104  220k  [0603-RES]  15.77,84.45 180 top
R105  2M  [0603-RES]  10.54,83.87 180 top
R106  2M  [0603-RES]  51.61,83.67 270 top
R107  220k  [0603-RES]  46.74,84.43 0 top
R108  1.2M  [0603-RES]  34.95,83.49 90 top
R109  220k  [0603-RES]  42.95,84.45 180 top
R110  2M  [0603-RES]  37.72,83.87 180 top
R111  2M  [0603-RES]  78.79,83.67 270 top
R112  220k  [0603-RES]  73.91,84.43 0 top
R113  1.2M  [0603-RES]  62.13,83.49 90 top
R114  220k  [0603-RES]  70.13,84.45 180 top
R115  2M  [0603-RES]  64.9,83.87 180 top
R116  2M  [0603-RES]  105.97,83.67 270 top
R117  220k  [0603-RES]  101.09,84.43 0 top
R118  1.2M  [0603-RES]  89.31,83.49 90 top
R119  220k  [0603-RES]  97.31,84.45 180 top
R120  2M  [0603-RES]  92.08,83.87 180 top
R121  2M  [0603-RES]  24.43,96.88 270 top
R122  220k  [0603-RES]  19.56,97.64 0 top
R123  1.2M  [0603-RES]  7.77,96.7 90 top
R124  220k  [0603-RES]  15.77,97.66 180 top
R125  2M  [0603-RES]  10.54,97.08 180 top
R126  2M  [0603-RES]  51.61,96.88 270 top
R127  220k  [0603-RES]  46.74,97.64 0 top
R128  1.2M  [0603-RES]  34.95,96.7 90 top
R129  220k  [0603-RES]  42.95,97.66 180 top
R130  2M  [0603-RES]  37.72,97.08 180 top
R131  2M  [0603-RES]  78.79,96.88 270 top
R132  220k  [0603-RES]  73.91,97.64 0 top
R133  1.2M  [0603-RES]  62.13,96.7 90 top
R134  220k  [0603-RES]  70.13,97.66 180 top
R135  2M  [0603-RES]  64.9,97.08 180 top
R136  2M  [0603-RES]  105.97,96.88 270 top
R137  220k  [0603-RES]  101.09,97.64 0 top
R138  1.2M  [0603-RES]  89.31,96.7 90 top
R139  220k  [0603-RES]  97.31,97.66 180 top
R140  2M  [0603-RES]  92.08,97.08 180 top
R141  2M  [0603-RES]  24.43,110.08 270 top
R142  220k  [0603-RES]  19.56,110.85 0 top
R143  1.2M  [0603-RES]  7.77,109.91 90 top
R144  220k  [0603-RES]  15.77,110.87 180 top
R145  2M  [0603-RES]  10.54,110.29 180 top
R146  2M  [0603-RES]  51.61,110.08 270 top
R147  220k  [0603-RES]  46.74,110.85 0 top
R148  1.2M  [0603-RES]  34.95,109.91 90 top
R149  220k  [0603-RES]  42.95,110.87 180 top
R150  2M  [0603-RES]  37.72,110.29 180 top
R151  2M  [0603-RES]  78.79,110.08 270 top
R152  220k  [0603-RES]  73.91,110.85 0 top
R153  1.2M  [0603-RES]  62.13,109.91 90 top
R154  220k  [0603-RES]  70.13,110.87 180 top
R155  2M  [0603-RES]  64.9,110.29 180 top
R156  2M  [0603-RES]  105.97,110.08 270 top
R157  220k  [0603-RES]  101.09,110.85 0 top
R158  1.2M  [0603-RES]  89.31,109.91 90 top
R159  220k  [0603-RES]  97.31,110.87 180 top
R160  2M  [0603-RES]  92.08,110.29 180 top
SJ1  [SJ_3_PASTE2&3]  13.18,17.78 90 top
SJ2  [SJ_3_PASTE2&3]  40.36,17.78 90 top
SJ3  [SJ_3_PASTE2&3]  67.54,17.78 90 top
SJ4  [SJ_3_PASTE2&3]  94.72,17.78 90 top
SJ5  [SJ_3_PASTE2&3]  13.18,30.99 90 top
SJ6  [SJ_3_PASTE2&3]  40.36,30.99 90 top
SJ7  [SJ_3_PASTE2&3]  67.54,30.99 90 top
SJ8  [SJ_3_PASTE2&3]  94.72,30.99 90 top
SJ9  [SJ_3_PASTE2&3]  13.18,44.2 90 top
SJ10  [SJ_3_PASTE2&3]  40.36,44.2 90 top
SJ11  [SJ_3_PASTE2&3]  67.54,44.2 90 top
SJ12  [SJ_3_PASTE2&3]  94.72,44.2 90 top
SJ13  [SJ_3_PASTE2&3]  13.18,57.4 90 top
SJ14  [SJ_3_PASTE2&3]  40.36,57.4 90 top
SJ15  [SJ_3_PASTE2&3]  67.54,57.4 90 top
SJ16  [SJ_3_PASTE2&3]  94.72,57.4 90 top
SJ17  [SJ_3_PASTE2&3]  13.18,70.61 90 top
SJ18  [SJ_3_PASTE2&3]  40.36,70.61 90 top
SJ19  [SJ_3_PASTE2&3]  67.54,70.61 90 top
SJ20  [SJ_3_PASTE2&3]  94.72,70.61 90 top
SJ21  [SJ_3_PASTE2&3]  13.18,83.82 90 top
SJ22  [SJ_3_PASTE2&3]  40.36,83.82 90 top
SJ23  [SJ_3_PASTE2&3]  67.54,83.82 90 top
SJ24  [SJ_3_PASTE2&3]  94.72,83.82 90 top
SJ25  [SJ_3_PASTE2&3]  13.18,97.03 90 top
SJ26  [SJ_3_PASTE2&3]  40.36,97.03 90 top
SJ27  [SJ_3_PASTE2&3]  67.54,97.03 90 top
SJ28  [SJ_3_PASTE2&3]  94.72,97.03 90 top
SJ29  [SJ_3_PASTE2&3]  13.18,110.24 90 top
SJ30  [SJ_3_PASTE2&3]  40.36,110.24 90 top
SJ31  [SJ_3_PASTE2&3]  67.54,110.24 90 top
SJ32  [SJ_3_PASTE2&3]  94.72,110.24 90 top
U1  TPS61200  [QFN-10_PAD]  16.26,14.43 0 top
U2  TPS61200  [QFN-10_PAD]  43.43,14.43 0 top
U3  TPS61200  [QFN-10_PAD]  70.61,14.43 0 top
U4  TPS61200  [QFN-10_PAD]  97.79,14.43 0 top
U5  TPS61200  [QFN-10_PAD]  16.26,27.64 0 top
U6  TPS61200  [QFN-10_PAD]  43.43,27.64 0 top
U7  TPS61200  [QFN-10_PAD]  70.61,27.64 0 top
U8  TPS61200  [QFN-10_PAD]  97.79,27.64 0 top
U9  TPS61200  [QFN-10_PAD]  16.26,40.84 0 top
U10  TPS61200  [QFN-10_PAD]  43.43,40.84 0 top
U11  TPS61200  [QFN-10_PAD]  70.61,40.84 0 top
U12  TPS61200  [QFN-10_PAD]  97.79,40.84 0 top
U13  TPS61200  [QFN-10_PAD]  16.26,54.05 0 top
U14  TPS61200  [QFN-10_PAD]  43.43,54.05 0 top
U15  TPS61200  [QFN-10_PAD]  70.61,54.05 0 top
U16  TPS61200  [QFN-10_PAD]  97.79,54.05 0 top
U17  TPS61200  [QFN-10_PAD]  16.26,67.26 0 top
U18  TPS61200  [QFN-10_PAD]  43.43,67.26 0 top
U19  TPS61200  [QFN-10_PAD]  70.61,67.26 0 top
U20  TPS61200  [QFN-10_PAD]  97.79,67.26 0 top
U21  TPS61200  [QFN-10_PAD]  16.26,80.47 0 top
U22  TPS61200  [QFN-10_PAD]  43.43,80.47 0 top
U23  TPS61200  [QFN-10_PAD]  70.61,80.47 0 top
U24  TPS61200  [QFN-10_PAD]  97.79,80.47 0 top
U25  TPS61200  [QFN-10_PAD]  16.26,93.68 0 top
U26  TPS61200  [QFN-10_PAD]  43.43,93.68 0 top
U27  TPS61200  [QFN-10_PAD]  70.61,93.68 0 top
U28  TPS61200  [QFN-10_PAD]  97.79,93.68 0 top
U29  TPS61200  [QFN-10_PAD]  16.26,106.88 0 top
U30  TPS61200  [QFN-10_PAD]  43.43,106.88 0 top
U31  TPS61200  [QFN-10_PAD]  70.61,106.88 0 top
U32  TPS61200  [QFN-10_PAD]  97.79,106.88 0 top
U$1  [OSHW-LOGO-S]  58.8,8.51 0 bottom
U$2  [OSHW-LOGO-S]  31.62,8.51 0 bottom
U$3  [OSHW-LOGO-S]  85.98,8.51 0 bottom
U$4  [OSHW-LOGO-S]  113.16,8.51 0 bottom
U$5  [OSHW-LOGO-S]  31.62,21.72 0 bottom
U$6  [OSHW-LOGO-S]  58.8,21.72 0 bottom
U$7  [OSHW-LOGO-S]  85.98,21.72 0 bottom
U$8  [OSHW-LOGO-S]  113.16,21.72 0 bottom
U$9  [OSHW-LOGO-S]  31.62,34.92 0 bottom
U$10  [OSHW-LOGO-S]  58.8,34.92 0 bottom
U$11  [OSHW-LOGO-S]  85.98,34.92 0 bottom
U$12  [OSHW-LOGO-S]  113.16,34.92 0 bottom
U$13  [OSHW-LOGO-S]  31.62,48.13 0 bottom
U$14  [OSHW-LOGO-S]  58.8,48.13 0 bottom
U$15  [OSHW-LOGO-S]  85.98,48.13 0 bottom
U$16  [OSHW-LOGO-S]  113.16,48.13 0 bottom
U$17  [OSHW-LOGO-S]  31.62,61.34 0 bottom
U$18  [OSHW-LOGO-S]  58.8,61.34 0 bottom
U$19  [OSHW-LOGO-S]  85.98,61.34 0 bottom
U$20  [OSHW-LOGO-S]  113.16,61.34 0 bottom
U$21  [OSHW-LOGO-S]  31.62,74.55 0 bottom
U$22  [OSHW-LOGO-S]  58.8,74.55 0 bottom
U$23  [OSHW-LOGO-S]  85.98,74.55 0 bottom
U$24  [OSHW-LOGO-S]  113.16,74.55 0 bottom
U$25  [OSHW-LOGO-S]  31.62,87.76 0 bottom
U$26  [OSHW-LOGO-S]  58.8,87.76 0 bottom
U$27  [OSHW-LOGO-S]  85.98,87.76 0 bottom
U$28  [OSHW-LOGO-S]  113.16,87.76 0 bottom
U$29  [OSHW-LOGO-S]  31.62,100.97 0 bottom
U$30  [OSHW-LOGO-S]  58.8,100.97 0 bottom
U$31  [OSHW-LOGO-S]  85.98,100.97 0 bottom
U$32  [OSHW-LOGO-S]  113.16,100.97 0 bottom

## Library data of the parts
C1 C3 C5 C8 C9 C12 C13 C16 C17 C20 C21 C24 C25 C28 C29 C32 C33 C36 C37 C40 C41 C44 C45 C48 C49 C52 C53 C56 C57 C60 C61 C64 C65 C68 C69 C72 C73 C76 C77 C80 C81 C84 C85 C88 C89 C92 C93 C96 C97 C100 C101 C104 C105 C108 C109 C112 C113 C116 C117 C120 C121 C124 C125 C128 = CH_passive
C2 C4 C6 C7 C10 C11 C14 C15 C18 C19 C22 C23 C26 C27 C30 C31 C34 C35 C38 C39 C42 C43 C46 C47 C50 C51 C54 C55 C58 C59 C62 C63 C66 C67 C70 C71 C74 C75 C78 C79 C82 C83 C86 C87 C90 C91 C94 C95 C98 C99 C102 C103 C106 C107 C110 C111 C114 C115 C118 C119 C122 C123 C126 C127 JP1-JP224 L1-L32 R1-R160 SJ1-SJ32 U1-U32 = SparkFun
E$1 E$4 E$5 U$1-U$32 = SparkFun-Aesthetics

## Nets
3.3V: R5.1 SJ1.1
3.3V1: R8.1 SJ2.1
3.3V2: R13.1 SJ3.1
3.3V3: R18.1 SJ4.1
3.3V4: R23.1 SJ5.1
3.3V5: R28.1 SJ6.1
3.3V6: R33.1 SJ7.1
3.3V7: R38.1 SJ8.1
3.3V8: R43.1 SJ9.1
3.3V9: R48.1 SJ10.1
3.3V10: R53.1 SJ11.1
3.3V11: R58.1 SJ12.1
3.3V12: R63.1 SJ13.1
3.3V13: R68.1 SJ14.1
3.3V14: R73.1 SJ15.1
3.3V15: R78.1 SJ16.1
3.3V16: R83.1 SJ17.1
3.3V17: R88.1 SJ18.1
3.3V18: R93.1 SJ19.1
3.3V19: R98.1 SJ20.1
3.3V20: R103.1 SJ21.1
3.3V21: R108.1 SJ22.1
3.3V22: R113.1 SJ23.1
3.3V23: R118.1 SJ24.1
3.3V24: R123.1 SJ25.1
3.3V25: R128.1 SJ26.1
3.3V26: R133.1 SJ27.1
3.3V27: R138.1 SJ28.1
3.3V28: R143.1 SJ29.1
3.3V29: R148.1 SJ30.1
3.3V30: R153.1 SJ31.1
3.3V31: R158.1 SJ32.1
5V: R7.1 SJ1.3
5V1: R10.1 SJ2.3
5V2: R15.1 SJ3.3
5V3: R20.1 SJ4.3
5V4: R25.1 SJ5.3
5V5: R30.1 SJ6.3
5V6: R35.1 SJ7.3
5V7: R40.1 SJ8.3
5V8: R45.1 SJ9.3
5V9: R50.1 SJ10.3
5V10: R55.1 SJ11.3
5V11: R60.1 SJ12.3
5V12: R65.1 SJ13.3
5V13: R70.1 SJ14.3
5V14: R75.1 SJ15.3
5V15: R80.1 SJ16.3
5V16: R85.1 SJ17.3
5V17: R90.1 SJ18.3
5V18: R95.1 SJ19.3
5V19: R100.1 SJ20.3
5V20: R105.1 SJ21.3
5V21: R110.1 SJ22.3
5V22: R115.1 SJ23.3
5V23: R120.1 SJ24.3
5V24: R125.1 SJ25.3
5V25: R130.1 SJ26.3
5V26: R135.1 SJ27.3
5V27: R140.1 SJ28.3
5V28: R145.1 SJ29.3
5V29: R150.1 SJ30.3
5V30: R155.1 SJ31.3
5V31: R160.1 SJ32.3
FB: R6.2 SJ1.2 U1.10
FB1: R9.2 SJ2.2 U2.10
FB2: R14.2 SJ3.2 U3.10
FB3: R19.2 SJ4.2 U4.10
FB4: R24.2 SJ5.2 U5.10
FB5: R29.2 SJ6.2 U6.10
FB6: R34.2 SJ7.2 U7.10
FB7: R39.2 SJ8.2 U8.10
FB8: R44.2 SJ9.2 U9.10
FB9: R49.2 SJ10.2 U10.10
FB10: R54.2 SJ11.2 U11.10
FB11: R59.2 SJ12.2 U12.10
FB12: R64.2 SJ13.2 U13.10
FB13: R69.2 SJ14.2 U14.10
FB14: R74.2 SJ15.2 U15.10
FB15: R79.2 SJ16.2 U16.10
FB16: R84.2 SJ17.2 U17.10
FB17: R89.2 SJ18.2 U18.10
FB18: R94.2 SJ19.2 U19.10
FB19: R99.2 SJ20.2 U20.10
FB20: R104.2 SJ21.2 U21.10
FB21: R109.2 SJ22.2 U22.10
FB22: R114.2 SJ23.2 U23.10
FB23: R119.2 SJ24.2 U24.10
FB24: R124.2 SJ25.2 U25.10
FB25: R129.2 SJ26.2 U26.10
FB26: R134.2 SJ27.2 U27.10
FB27: R139.2 SJ28.2 U28.10
FB28: R144.2 SJ29.2 U29.10
FB29: R149.2 SJ30.2 U30.10
FB30: R154.2 SJ31.2 U31.10
FB31: R159.2 SJ32.2 U32.10
GND: C1.2 C3.2 C4.2 JP1.1 JP3.1 JP7.1 R4.1 R6.1 U1.4 U1.9 U1.11 U1.12 U1.13 U1.14 U1.15
GND1: C5.2 C7.2 C8.2 JP8.1 JP9.1 JP14.1 R2.1 R9.1 U2.4 U2.9 U2.11 U2.12 U2.13 U2.14 U2.15
GND2: C9.2 C11.2 C12.2 JP15.1 JP16.1 JP21.1 R12.1 R14.1 U3.4 U3.9 U3.11 U3.12 U3.13 U3.14 U3.15
GND3: C13.2 C15.2 C16.2 JP22.1 JP23.1 JP28.1 R17.1 R19.1 U4.4 U4.9 U4.11 U4.12 U4.13 U4.14 U4.15
GND4: C17.2 C19.2 C20.2 JP29.1 JP30.1 JP35.1 R22.1 R24.1 U5.4 U5.9 U5.11 U5.12 U5.13 U5.14 U5.15
GND5: C21.2 C23.2 C24.2 JP36.1 JP37.1 JP42.1 R27.1 R29.1 U6.4 U6.9 U6.11 U6.12 U6.13 U6.14 U6.15
GND6: C25.2 C27.2 C28.2 JP43.1 JP44.1 JP49.1 R32.1 R34.1 U7.4 U7.9 U7.11 U7.12 U7.13 U7.14 U7.15
GND7: C29.2 C31.2 C32.2 JP50.1 JP51.1 JP56.1 R37.1 R39.1 U8.4 U8.9 U8.11 U8.12 U8.13 U8.14 U8.15
GND8: C33.2 C35.2 C36.2 JP57.1 JP58.1 JP63.1 R42.1 R44.1 U9.4 U9.9 U9.11 U9.12 U9.13 U9.14 U9.15
GND9: C37.2 C39.2 C40.2 JP64.1 JP65.1 JP70.1 R47.1 R49.1 U10.4 U10.9 U10.11 U10.12 U10.13 U10.14 U10.15
GND10: C41.2 C43.2 C44.2 JP71.1 JP72.1 JP77.1 R52.1 R54.1 U11.4 U11.9 U11.11 U11.12 U11.13 U11.14 U11.15
GND11: C45.2 C47.2 C48.2 JP78.1 JP79.1 JP84.1 R57.1 R59.1 U12.4 U12.9 U12.11 U12.12 U12.13 U12.14 U12.15
GND12: C49.2 C51.2 C52.2 JP85.1 JP86.1 JP91.1 R62.1 R64.1 U13.4 U13.9 U13.11 U13.12 U13.13 U13.14 U13.15
GND13: C53.2 C55.2 C56.2 JP92.1 JP93.1 JP98.1 R67.1 R69.1 U14.4 U14.9 U14.11 U14.12 U14.13 U14.14 U14.15
GND14: C57.2 C59.2 C60.2 JP99.1 JP100.1 JP105.1 R72.1 R74.1 U15.4 U15.9 U15.11 U15.12 U15.13 U15.14 U15.15
GND15: C61.2 C63.2 C64.2 JP106.1 JP107.1 JP112.1 R77.1 R79.1 U16.4 U16.9 U16.11 U16.12 U16.13 U16.14 U16.15
GND16: C65.2 C67.2 C68.2 JP113.1 JP114.1 JP119.1 R82.1 R84.1 U17.4 U17.9 U17.11 U17.12 U17.13 U17.14 U17.15
GND17: C69.2 C71.2 C72.2 JP120.1 JP121.1 JP126.1 R87.1 R89.1 U18.4 U18.9 U18.11 U18.12 U18.13 U18.14 U18.15
GND18: C73.2 C75.2 C76.2 JP127.1 JP128.1 JP133.1 R92.1 R94.1 U19.4 U19.9 U19.11 U19.12 U19.13 U19.14 U19.15
GND19: C77.2 C79.2 C80.2 JP134.1 JP135.1 JP140.1 R97.1 R99.1 U20.4 U20.9 U20.11 U20.12 U20.13 U20.14 U20.15
GND20: C81.2 C83.2 C84.2 JP141.1 JP142.1 JP147.1 R102.1 R104.1 U21.4 U21.9 U21.11 U21.12 U21.13 U21.14 U21.15
GND21: C85.2 C87.2 C88.2 JP148.1 JP149.1 JP154.1 R107.1 R109.1 U22.4 U22.9 U22.11 U22.12 U22.13 U22.14 U22.15
GND22: C89.2 C91.2 C92.2 JP155.1 JP156.1 JP161.1 R112.1 R114.1 U23.4 U23.9 U23.11 U23.12 U23.13 U23.14 U23.15
GND23: C93.2 C95.2 C96.2 JP162.1 JP163.1 JP168.1 R117.1 R119.1 U24.4 U24.9 U24.11 U24.12 U24.13 U24.14 U24.15
GND24: C97.2 C99.2 C100.2 JP169.1 JP170.1 JP175.1 R122.1 R124.1 U25.4 U25.9 U25.11 U25.12 U25.13 U25.14 U25.15
GND25: C101.2 C103.2 C104.2 JP176.1 JP177.1 JP182.1 R127.1 R129.1 U26.4 U26.9 U26.11 U26.12 U26.13 U26.14 U26.15
GND26: C105.2 C107.2 C108.2 JP183.1 JP184.1 JP189.1 R132.1 R134.1 U27.4 U27.9 U27.11 U27.12 U27.13 U27.14 U27.15
GND27: C109.2 C111.2 C112.2 JP190.1 JP191.1 JP196.1 R137.1 R139.1 U28.4 U28.9 U28.11 U28.12 U28.13 U28.14 U28.15
GND28: C113.2 C115.2 C116.2 JP197.1 JP198.1 JP203.1 R142.1 R144.1 U29.4 U29.9 U29.11 U29.12 U29.13 U29.14 U29.15
GND29: C117.2 C119.2 C120.2 JP204.1 JP205.1 JP210.1 R147.1 R149.1 U30.4 U30.9 U30.11 U30.12 U30.13 U30.14 U30.15
GND30: C121.2 C123.2 C124.2 JP211.1 JP212.1 JP217.1 R152.1 R154.1 U31.4 U31.9 U31.11 U31.12 U31.13 U31.14 U31.15
GND31: C125.2 C127.2 C128.2 JP218.1 JP219.1 JP224.1 R157.1 R159.1 U32.4 U32.9 U32.11 U32.12 U32.13 U32.14 U32.15
N$1: C4.1 U1.1
N$2: L1.P$1 U1.3
N$3: L2.P$1 U2.3
N$4: C7.1 U2.1
N$5: L3.P$1 U3.3
N$6: C11.1 U3.1
N$7: L4.P$1 U4.3
N$8: C15.1 U4.1
N$9: L5.P$1 U5.3
N$10: C19.1 U5.1
N$11: L6.P$1 U6.3
N$12: C23.1 U6.1
N$13: L7.P$1 U7.3
N$14: C27.1 U7.1
N$15: L8.P$1 U8.3
N$16: C31.1 U8.1
N$17: L9.P$1 U9.3
N$18: C35.1 U9.1
N$19: L10.P$1 U10.3
N$20: C39.1 U10.1
N$21: L11.P$1 U11.3
N$22: C43.1 U11.1
N$23: L12.P$1 U12.3
N$24: C47.1 U12.1
N$25: L13.P$1 U13.3
N$26: C51.1 U13.1
N$27: L14.P$1 U14.3
N$28: C55.1 U14.1
N$29: L15.P$1 U15.3
N$30: C59.1 U15.1
N$31: L16.P$1 U16.3
N$32: C63.1 U16.1
N$33: L17.P$1 U17.3
N$34: C67.1 U17.1
N$35: L18.P$1 U18.3
N$36: C71.1 U18.1
N$37: L19.P$1 U19.3
N$38: C75.1 U19.1
N$39: L20.P$1 U20.3
N$40: C79.1 U20.1
N$41: L21.P$1 U21.3
N$42: C83.1 U21.1
N$43: L22.P$1 U22.3
N$44: C87.1 U22.1
N$45: L23.P$1 U23.3
N$46: C91.1 U23.1
N$47: L24.P$1 U24.3
N$48: C95.1 U24.1
N$49: L25.P$1 U25.3
N$50: C99.1 U25.1
N$51: L26.P$1 U26.3
N$52: C103.1 U26.1
N$53: L27.P$1 U27.3
N$54: C107.1 U27.1
N$55: L28.P$1 U28.3
N$56: C111.1 U28.1
N$57: L29.P$1 U29.3
N$58: C115.1 U29.1
N$59: L30.P$1 U30.3
N$60: C119.1 U30.1
N$61: L31.P$1 U31.3
N$62: C123.1 U31.1
N$63: L32.P$1 U32.3
N$64: C127.1 U32.1
UVLO: C2.2 R3.1 R4.2 U1.7
UVLO1: C6.2 R1.1 R2.2 U2.7
UVLO2: C10.2 R11.1 R12.2 U3.7
UVLO3: C14.2 R16.1 R17.2 U4.7
UVLO4: C18.2 R21.1 R22.2 U5.7
UVLO5: C22.2 R26.1 R27.2 U6.7
UVLO6: C26.2 R31.1 R32.2 U7.7
UVLO7: C30.2 R36.1 R37.2 U8.7
UVLO8: C34.2 R41.1 R42.2 U9.7
UVLO9: C38.2 R46.1 R47.2 U10.7
UVLO10: C42.2 R51.1 R52.2 U11.7
UVLO11: C46.2 R56.1 R57.2 U12.7
UVLO12: C50.2 R61.1 R62.2 U13.7
UVLO13: C54.2 R66.1 R67.2 U14.7
UVLO14: C58.2 R71.1 R72.2 U15.7
UVLO15: C62.2 R76.1 R77.2 U16.7
UVLO16: C66.2 R81.1 R82.2 U17.7
UVLO17: C70.2 R86.1 R87.2 U18.7
UVLO18: C74.2 R91.1 R92.2 U19.7
UVLO19: C78.2 R96.1 R97.2 U20.7
UVLO20: C82.2 R101.1 R102.2 U21.7
UVLO21: C86.2 R106.1 R107.2 U22.7
UVLO22: C90.2 R111.1 R112.2 U23.7
UVLO23: C94.2 R116.1 R117.2 U24.7
UVLO24: C98.2 R121.1 R122.2 U25.7
UVLO25: C102.2 R126.1 R127.2 U26.7
UVLO26: C106.2 R131.1 R132.2 U27.7
UVLO27: C110.2 R136.1 R137.2 U28.7
UVLO28: C114.2 R141.1 R142.2 U29.7
UVLO29: C118.2 R146.1 R147.2 U30.7
UVLO30: C122.2 R151.1 R152.2 U31.7
UVLO31: C126.2 R156.1 R157.2 U32.7
VCC: C3.1 JP1.2 R5.2 R7.2 U1.2
VCC1: C5.1 JP9.2 R8.2 R10.2 U2.2
VCC2: C9.1 JP16.2 R13.2 R15.2 U3.2
VCC3: C13.1 JP23.2 R18.2 R20.2 U4.2
VCC4: C17.1 JP30.2 R23.2 R25.2 U5.2
VCC5: C21.1 JP37.2 R28.2 R30.2 U6.2
VCC6: C25.1 JP44.2 R33.2 R35.2 U7.2
VCC7: C29.1 JP51.2 R38.2 R40.2 U8.2
VCC8: C33.1 JP58.2 R43.2 R45.2 U9.2
VCC9: C37.1 JP65.2 R48.2 R50.2 U10.2
VCC10: C41.1 JP72.2 R53.2 R55.2 U11.2
VCC11: C45.1 JP79.2 R58.2 R60.2 U12.2
VCC12: C49.1 JP86.2 R63.2 R65.2 U13.2
VCC13: C53.1 JP93.2 R68.2 R70.2 U14.2
VCC14: C57.1 JP100.2 R73.2 R75.2 U15.2
VCC15: C61.1 JP107.2 R78.2 R80.2 U16.2
VCC16: C65.1 JP114.2 R83.2 R85.2 U17.2
VCC17: C69.1 JP121.2 R88.2 R90.2 U18.2
VCC18: C73.1 JP128.2 R93.2 R95.2 U19.2
VCC19: C77.1 JP135.2 R98.2 R100.2 U20.2
VCC20: C81.1 JP142.2 R103.2 R105.2 U21.2
VCC21: C85.1 JP149.2 R108.2 R110.2 U22.2
VCC22: C89.1 JP156.2 R113.2 R115.2 U23.2
VCC23: C93.1 JP163.2 R118.2 R120.2 U24.2
VCC24: C97.1 JP170.2 R123.2 R125.2 U25.2
VCC25: C101.1 JP177.2 R128.2 R130.2 U26.2
VCC26: C105.1 JP184.2 R133.2 R135.2 U27.2
VCC27: C109.1 JP191.2 R138.2 R140.2 U28.2
VCC28: C113.1 JP198.2 R143.2 R145.2 U29.2
VCC29: C117.1 JP205.2 R148.2 R150.2 U30.2
VCC30: C121.1 JP212.2 R153.2 R155.2 U31.2
VCC31: C125.1 JP219.2 R158.2 R160.2 U32.2
VIN: C1.1 C2.1 JP3.2 JP7.2 L1.P$2 R3.2 U1.5 U1.6 U1.8
VIN1: C6.1 C8.1 JP8.2 JP14.2 L2.P$2 R1.2 U2.5 U2.6 U2.8
VIN2: C10.1 C12.1 JP15.2 JP21.2 L3.P$2 R11.2 U3.5 U3.6 U3.8
VIN3: C14.1 C16.1 JP22.2 JP28.2 L4.P$2 R16.2 U4.5 U4.6 U4.8
VIN4: C18.1 C20.1 JP29.2 JP35.2 L5.P$2 R21.2 U5.5 U5.6 U5.8
VIN5: C22.1 C24.1 JP36.2 JP42.2 L6.P$2 R26.2 U6.5 U6.6 U6.8
VIN6: C26.1 C28.1 JP43.2 JP49.2 L7.P$2 R31.2 U7.5 U7.6 U7.8
VIN7: C30.1 C32.1 JP50.2 JP56.2 L8.P$2 R36.2 U8.5 U8.6 U8.8
VIN8: C34.1 C36.1 JP57.2 JP63.2 L9.P$2 R41.2 U9.5 U9.6 U9.8
VIN9: C38.1 C40.1 JP64.2 JP70.2 L10.P$2 R46.2 U10.5 U10.6 U10.8
VIN10: C42.1 C44.1 JP71.2 JP77.2 L11.P$2 R51.2 U11.5 U11.6 U11.8
VIN11: C46.1 C48.1 JP78.2 JP84.2 L12.P$2 R56.2 U12.5 U12.6 U12.8
VIN12: C50.1 C52.1 JP85.2 JP91.2 L13.P$2 R61.2 U13.5 U13.6 U13.8
VIN13: C54.1 C56.1 JP92.2 JP98.2 L14.P$2 R66.2 U14.5 U14.6 U14.8
VIN14: C58.1 C60.1 JP99.2 JP105.2 L15.P$2 R71.2 U15.5 U15.6 U15.8
VIN15: C62.1 C64.1 JP106.2 JP112.2 L16.P$2 R76.2 U16.5 U16.6 U16.8
VIN16: C66.1 C68.1 JP113.2 JP119.2 L17.P$2 R81.2 U17.5 U17.6 U17.8
VIN17: C70.1 C72.1 JP120.2 JP126.2 L18.P$2 R86.2 U18.5 U18.6 U18.8
VIN18: C74.1 C76.1 JP127.2 JP133.2 L19.P$2 R91.2 U19.5 U19.6 U19.8
VIN19: C78.1 C80.1 JP134.2 JP140.2 L20.P$2 R96.2 U20.5 U20.6 U20.8
VIN20: C82.1 C84.1 JP141.2 JP147.2 L21.P$2 R101.2 U21.5 U21.6 U21.8
VIN21: C86.1 C88.1 JP148.2 JP154.2 L22.P$2 R106.2 U22.5 U22.6 U22.8
VIN22: C90.1 C92.1 JP155.2 JP161.2 L23.P$2 R111.2 U23.5 U23.6 U23.8
VIN23: C94.1 C96.1 JP162.2 JP168.2 L24.P$2 R116.2 U24.5 U24.6 U24.8
VIN24: C98.1 C100.1 JP169.2 JP175.2 L25.P$2 R121.2 U25.5 U25.6 U25.8
VIN25: C102.1 C104.1 JP176.2 JP182.2 L26.P$2 R126.2 U26.5 U26.6 U26.8
VIN26: C106.1 C108.1 JP183.2 JP189.2 L27.P$2 R131.2 U27.5 U27.6 U27.8
VIN27: C110.1 C112.1 JP190.2 JP196.2 L28.P$2 R136.2 U28.5 U28.6 U28.8
VIN28: C114.1 C116.1 JP197.2 JP203.2 L29.P$2 R141.2 U29.5 U29.6 U29.8
VIN29: C118.1 C120.1 JP204.2 JP210.2 L30.P$2 R146.2 U30.5 U30.6 U30.8
VIN30: C122.1 C124.1 JP211.2 JP217.2 L31.P$2 R151.2 U31.5 U31.6 U31.8
VIN31: C126.1 C128.1 JP218.2 JP224.2 L32.P$2 R156.2 U32.5 U32.6 U32.8

## Tracks (layer width: path | path; a pad name or v marks a point on that pad's centre or on a via)
3.3V
  Top 0.254: R5.1 7.77,16.66 8.13,17.02 10.16,14.99 12.32,14.99 13.08,15.75 13.08,16.87 SJ1.1
3.3V1
  Top 0.254: R8.1 34.95,16.66 35.31,17.02 37.34,14.99 39.5,14.99 40.26,15.75 40.26,16.87 SJ2.1
3.3V2
  Top 0.254: R13.1 62.13,16.66 62.48,17.02 64.52,14.99 66.67,14.99 67.44,15.75 67.44,16.87 SJ3.1
3.3V3
  Top 0.254: R18.1 89.31,16.66 89.66,17.02 91.69,14.99 93.85,14.99 94.62,15.75 94.62,16.87 SJ4.1
3.3V4
  Top 0.254: R23.1 7.77,29.87 8.13,30.23 10.16,28.19 12.32,28.19 13.08,28.96 13.08,30.07 SJ5.1
3.3V5
  Top 0.254: R28.1 34.95,29.87 35.31,30.23 37.34,28.19 39.5,28.19 40.26,28.96 40.26,30.07 SJ6.1
3.3V6
  Top 0.254: R33.1 62.13,29.87 62.48,30.23 64.52,28.19 66.67,28.19 67.44,28.96 67.44,30.07 SJ7.1
3.3V7
  Top 0.254: R38.1 89.31,29.87 89.66,30.23 91.69,28.19 93.85,28.19 94.62,28.96 94.62,30.07 SJ8.1
3.3V8
  Top 0.254: R43.1 7.77,43.08 8.13,43.43 10.16,41.4 12.32,41.4 13.08,42.16 13.08,43.28 SJ9.1
3.3V9
  Top 0.254: R48.1 34.95,43.08 35.31,43.43 37.34,41.4 39.5,41.4 40.26,42.16 40.26,43.28 SJ10.1
3.3V10
  Top 0.254: R53.1 62.13,43.08 62.48,43.43 64.52,41.4 66.67,41.4 67.44,42.16 67.44,43.28 SJ11.1
3.3V11
  Top 0.254: R58.1 89.31,43.08 89.66,43.43 91.69,41.4 93.85,41.4 94.62,42.16 94.62,43.28 SJ12.1
3.3V12
  Top 0.254: R63.1 7.77,56.29 8.13,56.64 10.16,54.61 12.32,54.61 13.08,55.37 13.08,56.49 SJ13.1
3.3V13
  Top 0.254: R68.1 34.95,56.29 35.31,56.64 37.34,54.61 39.5,54.61 40.26,55.37 40.26,56.49 SJ14.1
3.3V14
  Top 0.254: R73.1 62.13,56.29 62.48,56.64 64.52,54.61 66.67,54.61 67.44,55.37 67.44,56.49 SJ15.1
3.3V15
  Top 0.254: R78.1 89.31,56.29 89.66,56.64 91.69,54.61 93.85,54.61 94.62,55.37 94.62,56.49 SJ16.1
3.3V16
  Top 0.254: R83.1 7.77,69.49 8.13,69.85 10.16,67.82 12.32,67.82 13.08,68.58 13.08,69.7 SJ17.1
3.3V17
  Top 0.254: R88.1 34.95,69.49 35.31,69.85 37.34,67.82 39.5,67.82 40.26,68.58 40.26,69.7 SJ18.1
3.3V18
  Top 0.254: R93.1 62.13,69.49 62.48,69.85 64.52,67.82 66.67,67.82 67.44,68.58 67.44,69.7 SJ19.1
3.3V19
  Top 0.254: R98.1 89.31,69.49 89.66,69.85 91.69,67.82 93.85,67.82 94.62,68.58 94.62,69.7 SJ20.1
3.3V20
  Top 0.254: R103.1 7.77,82.7 8.13,83.06 10.16,81.03 12.32,81.03 13.08,81.79 13.08,82.91 SJ21.1
3.3V21
  Top 0.254: R108.1 34.95,82.7 35.31,83.06 37.34,81.03 39.5,81.03 40.26,81.79 40.26,82.91 SJ22.1
3.3V22
  Top 0.254: R113.1 62.13,82.7 62.48,83.06 64.52,81.03 66.67,81.03 67.44,81.79 67.44,82.91 SJ23.1
3.3V23
  Top 0.254: R118.1 89.31,82.7 89.66,83.06 91.69,81.03 93.85,81.03 94.62,81.79 94.62,82.91 SJ24.1
3.3V24
  Top 0.254: R123.1 7.77,95.91 8.13,96.27 10.16,94.23 12.32,94.23 13.08,95 13.08,96.11 SJ25.1
3.3V25
  Top 0.254: R128.1 34.95,95.91 35.31,96.27 37.34,94.23 39.5,94.23 40.26,95 40.26,96.11 SJ26.1
3.3V26
  Top 0.254: R133.1 62.13,95.91 62.48,96.27 64.52,94.23 66.67,94.23 67.44,95 67.44,96.11 SJ27.1
3.3V27
  Top 0.254: R138.1 89.31,95.91 89.66,96.27 91.69,94.23 93.85,94.23 94.62,95 94.62,96.11 SJ28.1
3.3V28
  Top 0.254: R143.1 7.77,109.12 8.13,109.47 10.16,107.44 12.32,107.44 13.08,108.2 13.08,109.32 SJ29.1
3.3V29
  Top 0.254: R148.1 34.95,109.12 35.31,109.47 37.34,107.44 39.5,107.44 40.26,108.2 40.26,109.32 SJ30.1
3.3V30
  Top 0.254: R153.1 62.13,109.12 62.48,109.47 64.52,107.44 66.67,107.44 67.44,108.2 67.44,109.32 SJ31.1
3.3V31
  Top 0.254: R158.1 89.31,109.12 89.66,109.47 91.69,107.44 93.85,107.44 94.62,108.2 94.62,109.32 SJ32.1
5V
  Top 0.254: SJ1.3 13.11,18.67 12.19,18.67 12.19,18.63 R7.1
5V1
  Top 0.254: SJ2.3 40.28,18.67 39.37,18.67 39.37,18.63 R10.1
5V2
  Top 0.254: SJ3.3 67.46,18.67 66.55,18.67 66.55,18.63 R15.1
5V3
  Top 0.254: SJ4.3 94.64,18.67 93.73,18.67 93.73,18.63 R20.1
5V4
  Top 0.254: SJ5.3 13.11,31.88 12.19,31.88 12.19,31.84 R25.1
5V5
  Top 0.254: SJ6.3 40.28,31.88 39.37,31.88 39.37,31.84 R30.1
5V6
  Top 0.254: SJ7.3 67.46,31.88 66.55,31.88 66.55,31.84 R35.1
5V7
  Top 0.254: SJ8.3 94.64,31.88 93.73,31.88 93.73,31.84 R40.1
5V8
  Top 0.254: SJ9.3 13.11,45.08 12.19,45.08 12.19,45.05 R45.1
5V9
  Top 0.254: SJ10.3 40.28,45.08 39.37,45.08 39.37,45.05 R50.1
5V10
  Top 0.254: SJ11.3 67.46,45.08 66.55,45.08 66.55,45.05 R55.1
5V11
  Top 0.254: SJ12.3 94.64,45.08 93.73,45.08 93.73,45.05 R60.1
5V12
  Top 0.254: SJ13.3 13.11,58.29 12.19,58.29 12.19,58.26 R65.1
5V13
  Top 0.254: SJ14.3 40.28,58.29 39.37,58.29 39.37,58.26 R70.1
5V14
  Top 0.254: SJ15.3 67.46,58.29 66.55,58.29 66.55,58.26 R75.1
5V15
  Top 0.254: SJ16.3 94.64,58.29 93.73,58.29 93.73,58.26 R80.1
5V16
  Top 0.254: SJ17.3 13.11,71.5 12.19,71.5 12.19,71.46 R85.1
5V17
  Top 0.254: SJ18.3 40.28,71.5 39.37,71.5 39.37,71.46 R90.1
5V18
  Top 0.254: SJ19.3 67.46,71.5 66.55,71.5 66.55,71.46 R95.1
5V19
  Top 0.254: SJ20.3 94.64,71.5 93.73,71.5 93.73,71.46 R100.1
5V20
  Top 0.254: SJ21.3 13.11,84.71 12.19,84.71 12.19,84.67 R105.1
5V21
  Top 0.254: SJ22.3 40.28,84.71 39.37,84.71 39.37,84.67 R110.1
5V22
  Top 0.254: SJ23.3 67.46,84.71 66.55,84.71 66.55,84.67 R115.1
5V23
  Top 0.254: SJ24.3 94.64,84.71 93.73,84.71 93.73,84.67 R120.1
5V24
  Top 0.254: SJ25.3 13.11,97.92 12.19,97.92 12.19,97.88 R125.1
5V25
  Top 0.254: SJ26.3 40.28,97.92 39.37,97.92 39.37,97.88 R130.1
5V26
  Top 0.254: SJ27.3 67.46,97.92 66.55,97.92 66.55,97.88 R135.1
5V27
  Top 0.254: SJ28.3 94.64,97.92 93.73,97.92 93.73,97.88 R140.1
5V28
  Top 0.254: SJ29.3 13.11,111.12 12.19,111.12 12.19,111.09 R145.1
5V29
  Top 0.254: SJ30.3 40.28,111.12 39.37,111.12 39.37,111.09 R150.1
5V30
  Top 0.254: SJ31.3 67.46,111.12 66.55,111.12 66.55,111.09 R155.1
5V31
  Top 0.254: SJ32.3 94.64,111.12 93.73,111.12 93.73,111.09 R160.1
FB
  Top 0.254: U1.10 15.26,16.75 14.86,17.14 14.86,17.7 | 14.86,17.7 14.86,18.35 R6.2 | SJ1.2 13.18,17.65 14.81,17.65 14.86,17.7
FB1
  Top 0.254: U2.10 42.43,16.75 42.04,17.14 42.04,17.7 | 42.04,17.7 42.04,18.35 R9.2 | SJ2.2 40.36,17.65 41.99,17.65 42.04,17.7
FB2
  Top 0.254: U3.10 69.61,16.75 69.22,17.14 69.22,17.7 | 69.22,17.7 69.22,18.35 R14.2 | SJ3.2 67.54,17.65 69.16,17.65 69.22,17.7
FB3
  Top 0.254: U4.10 96.79,16.75 96.39,17.14 96.39,17.7 | 96.39,17.7 96.39,18.35 R19.2 | SJ4.2 94.72,17.65 96.34,17.65 96.39,17.7
FB4
  Top 0.254: U5.10 15.26,29.96 14.86,30.35 14.86,30.91 | 14.86,30.91 14.86,31.56 R24.2 | SJ5.2 13.18,30.86 14.81,30.86 14.86,30.91
FB5
  Top 0.254: U6.10 42.43,29.96 42.04,30.35 42.04,30.91 | 42.04,30.91 42.04,31.56 R29.2 | SJ6.2 40.36,30.86 41.99,30.86 42.04,30.91
FB6
  Top 0.254: U7.10 69.61,29.96 69.22,30.35 69.22,30.91 | 69.22,30.91 69.22,31.56 R34.2 | SJ7.2 67.54,30.86 69.16,30.86 69.22,30.91
FB7
  Top 0.254: U8.10 96.79,29.96 96.39,30.35 96.39,30.91 | 96.39,30.91 96.39,31.56 R39.2 | SJ8.2 94.72,30.86 96.34,30.86 96.39,30.91
FB8
  Top 0.254: U9.10 15.26,43.16 14.86,43.56 14.86,44.12 | 14.86,44.12 14.86,44.77 R44.2 | SJ9.2 13.18,44.07 14.81,44.07 14.86,44.12
FB9
  Top 0.254: U10.10 42.43,43.16 42.04,43.56 42.04,44.12 | 42.04,44.12 42.04,44.77 R49.2 | SJ10.2 40.36,44.07 41.99,44.07 42.04,44.12
FB10
  Top 0.254: U11.10 69.61,43.16 69.22,43.56 69.22,44.12 | 69.22,44.12 69.22,44.77 R54.2 | SJ11.2 67.54,44.07 69.16,44.07 69.22,44.12
FB11
  Top 0.254: U12.10 96.79,43.16 96.39,43.56 96.39,44.12 | 96.39,44.12 96.39,44.77 R59.2 | SJ12.2 94.72,44.07 96.34,44.07 96.39,44.12
FB12
  Top 0.254: U13.10 15.26,56.37 14.86,56.77 14.86,57.33 | 14.86,57.33 14.86,57.97 R64.2 | SJ13.2 13.18,57.28 14.81,57.28 14.86,57.33
FB13
  Top 0.254: U14.10 42.43,56.37 42.04,56.77 42.04,57.33 | 42.04,57.33 42.04,57.97 R69.2 | SJ14.2 40.36,57.28 41.99,57.28 42.04,57.33
FB14
  Top 0.254: U15.10 69.61,56.37 69.22,56.77 69.22,57.33 | 69.22,57.33 69.22,57.97 R74.2 | SJ15.2 67.54,57.28 69.16,57.28 69.22,57.33
FB15